# EAGLE board SparkFun_Color_Sensor_OPT4048-Panel (EAGLE 9.6.2), part 1 of 4
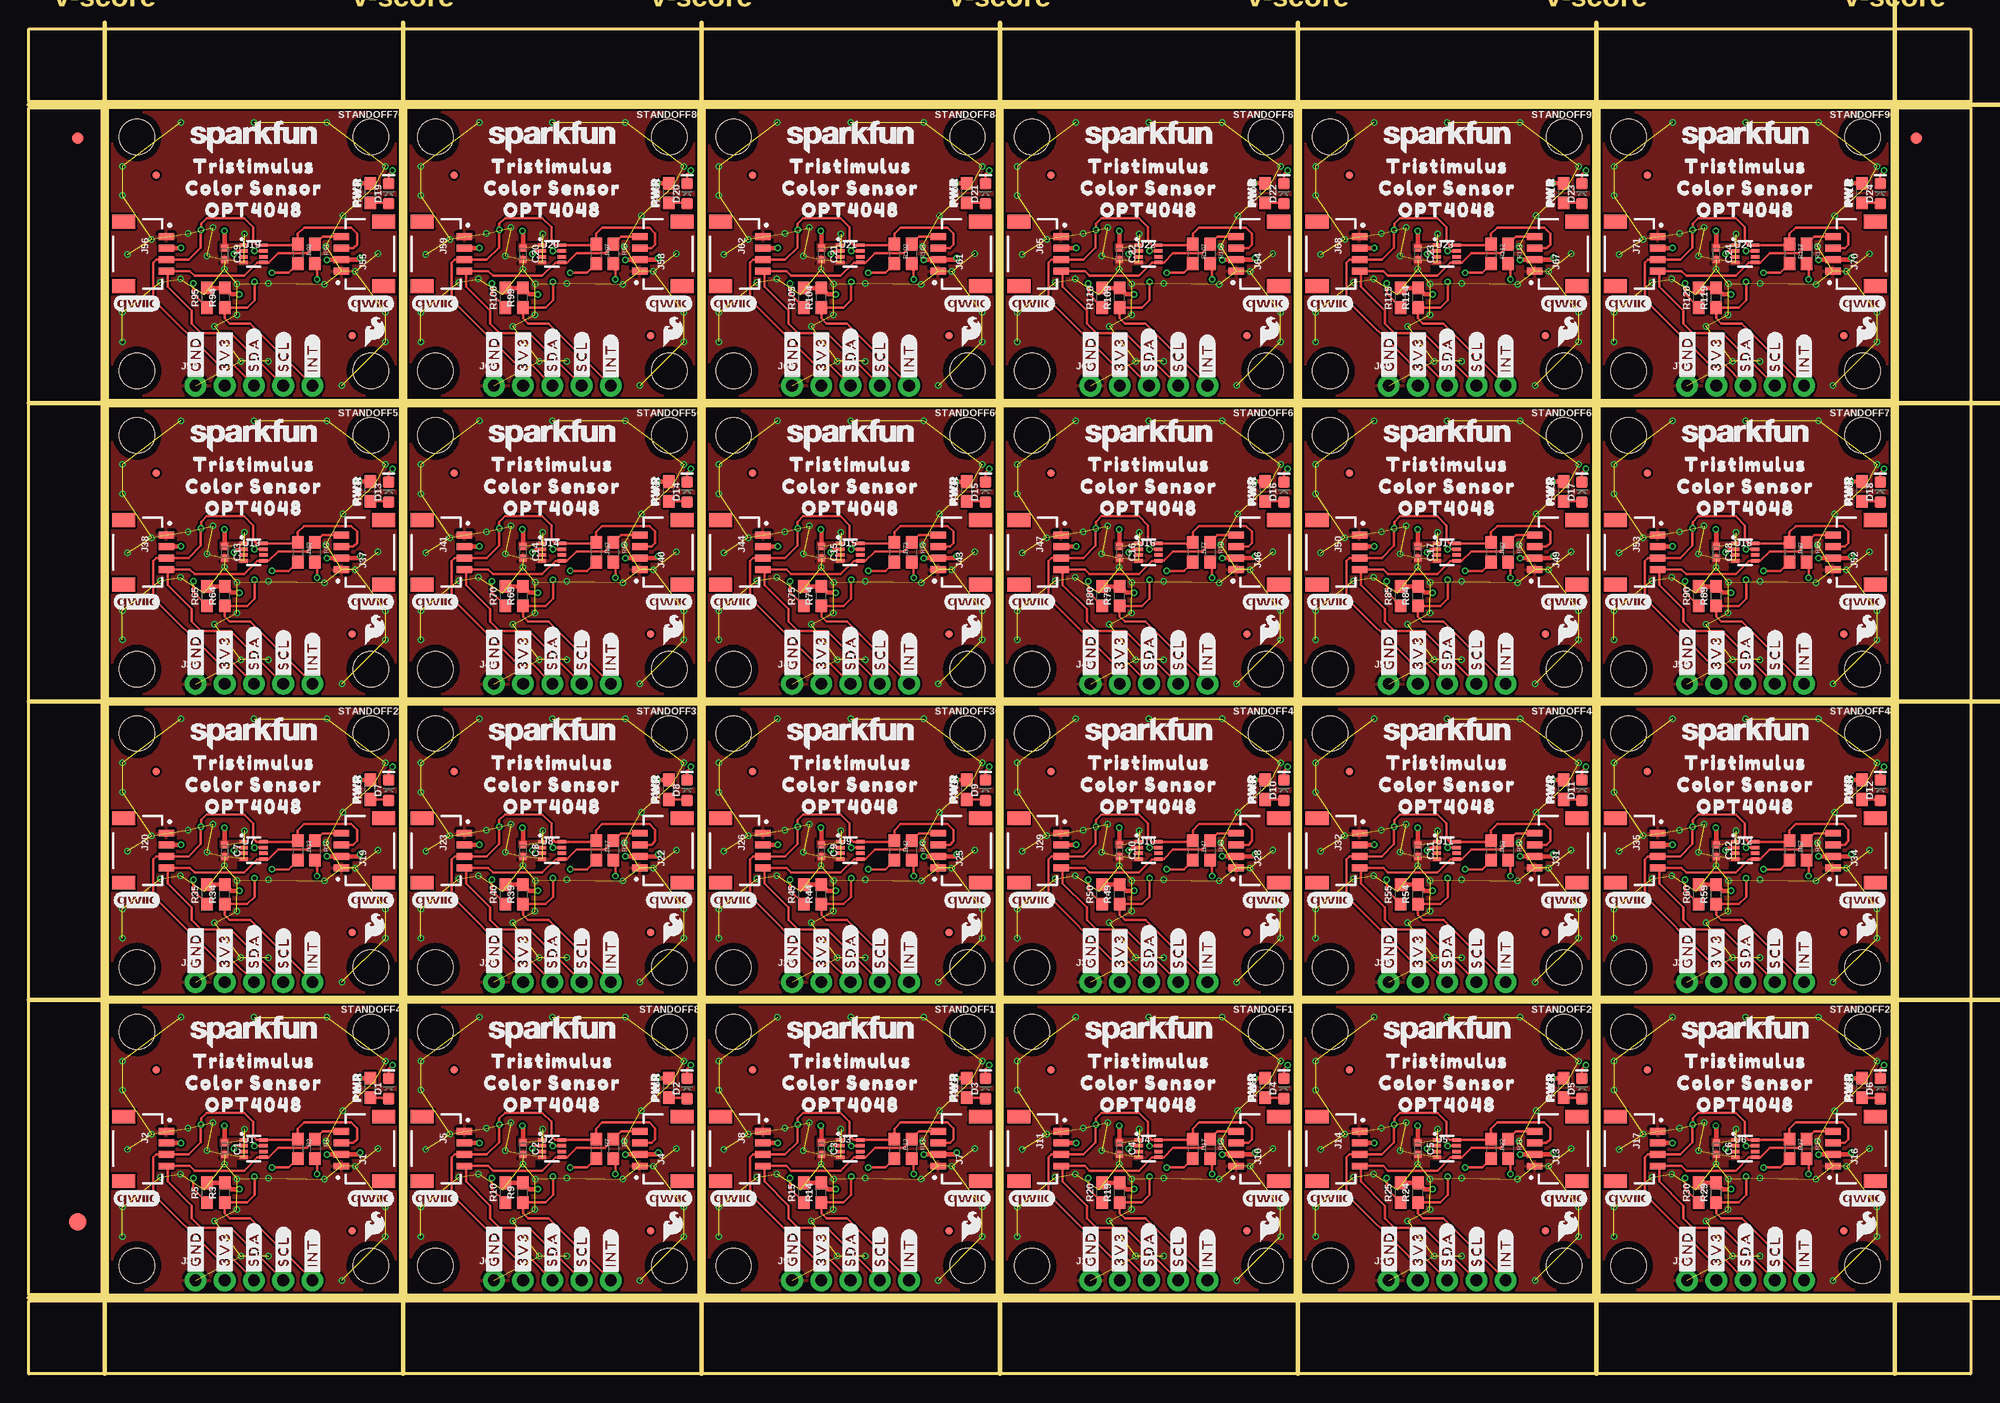
[diagram p0: board, top side]
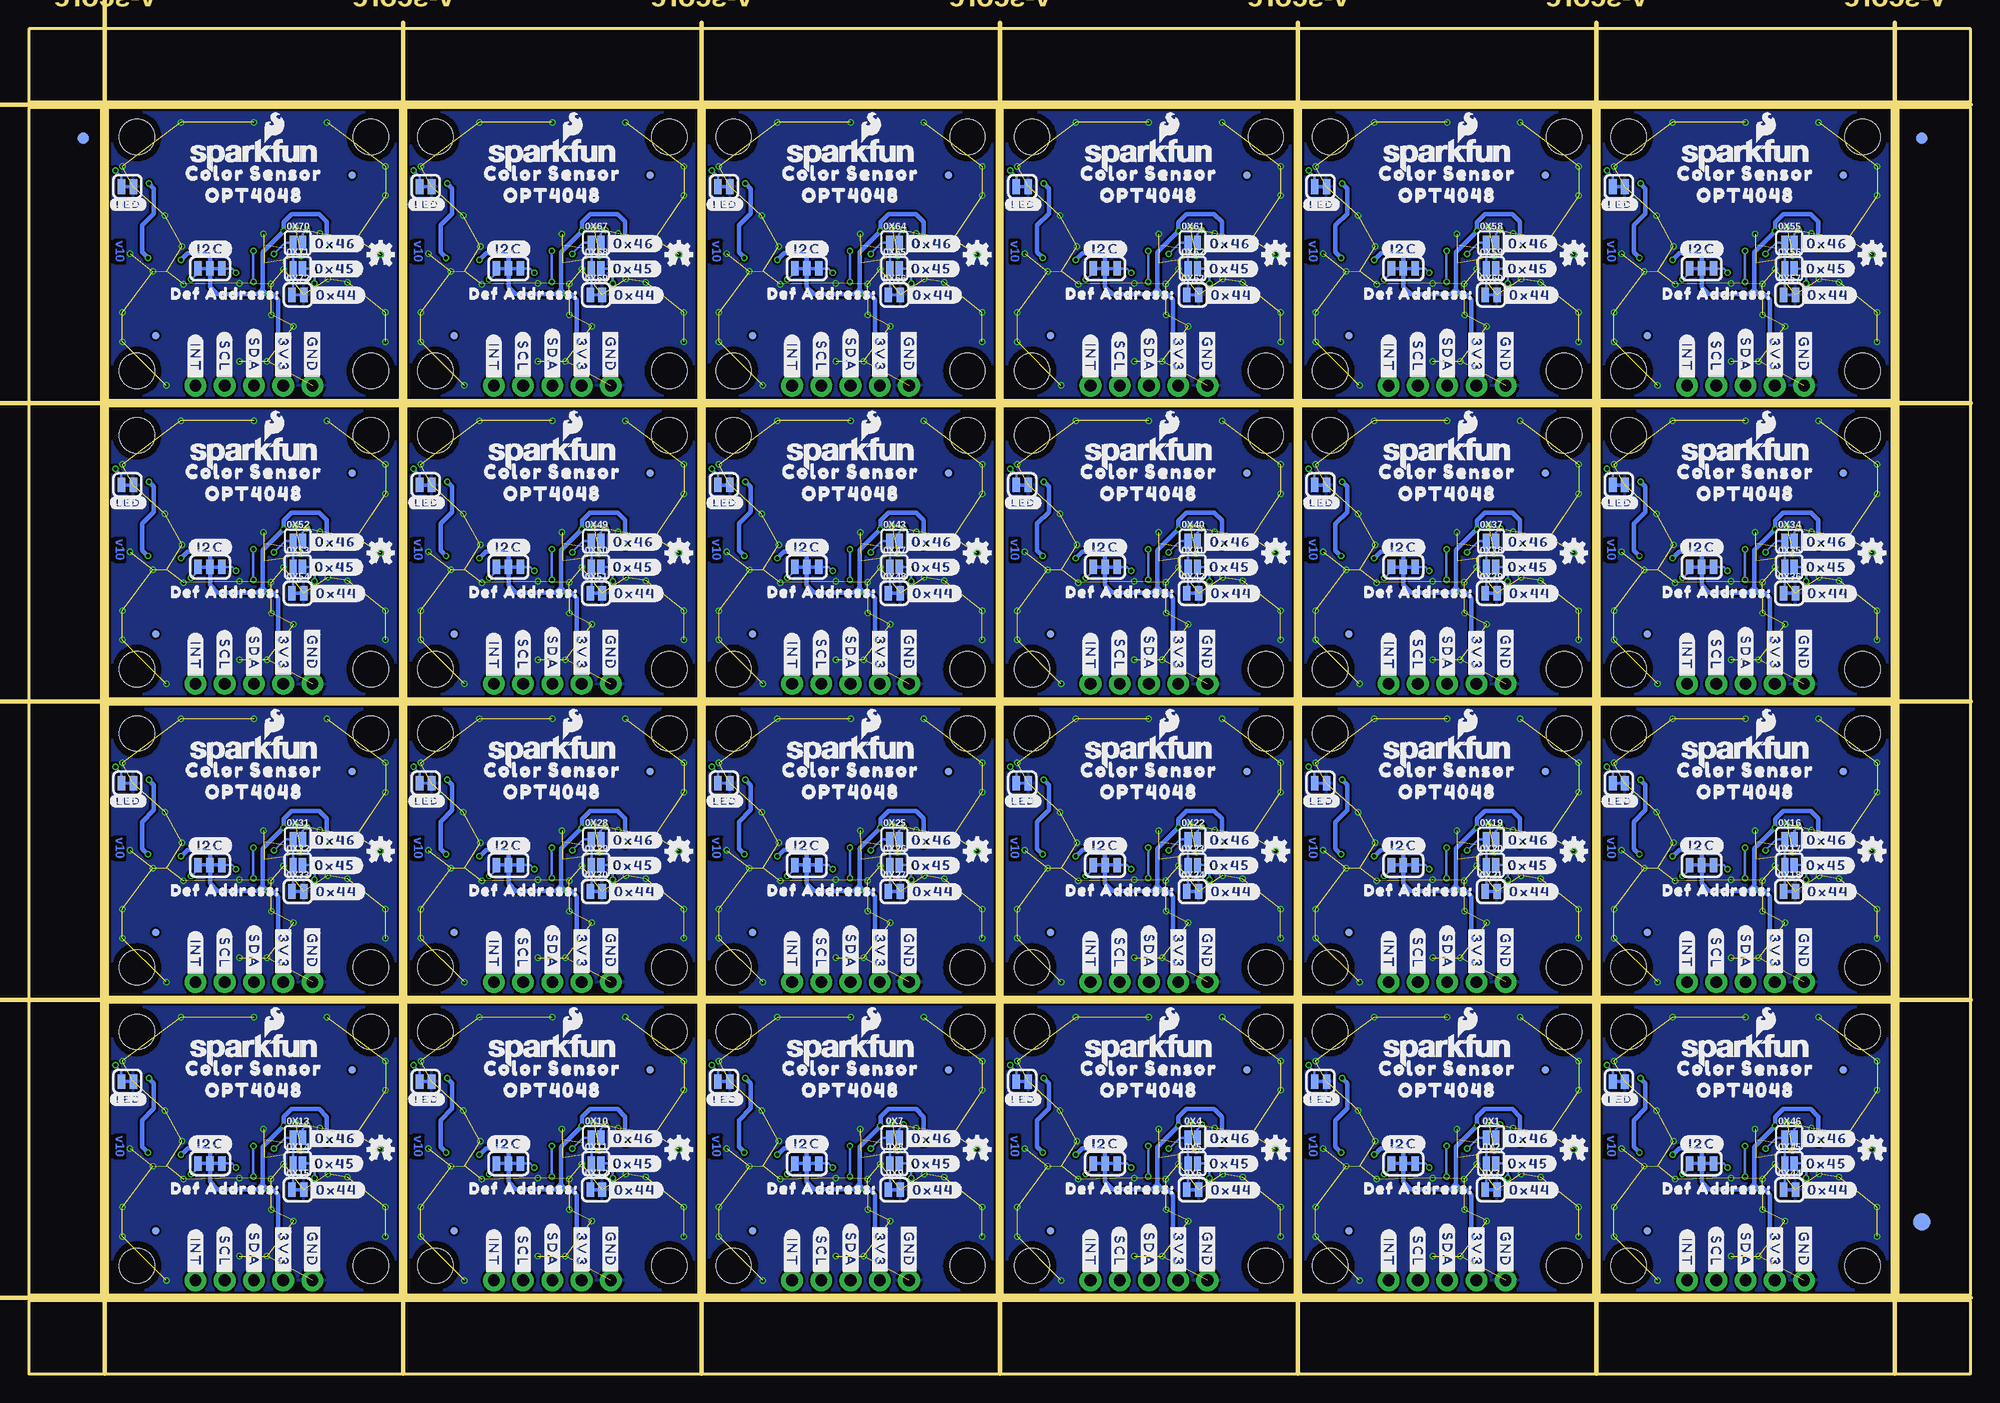
[diagram p1: board, bottom side, seen from below]

Size 168.66 x 116.84 mm. Coordinates in mm from the lower left corner, seen from the top.
Outline: 32.26,32.26 6.86,32.26 6.86,6.86 32.26,6.86 32.26,32.26
Outline: 58.17,32.26 32.77,32.26 32.77,6.86 58.17,6.86 58.17,32.26
Outline: 84.07,32.26 58.67,32.26 58.67,6.86 84.07,6.86 84.07,32.26
Outline: 109.98,32.26 84.58,32.26 84.58,6.86 109.98,6.86 109.98,32.26
Outline: 135.89,32.26 110.49,32.26 110.49,6.86 135.89,6.86 135.89,32.26
Outline: 161.8,32.26 136.4,32.26 136.4,6.86 161.8,6.86 161.8,32.26
Outline: 32.26,58.17 6.86,58.17 6.86,32.77 32.26,32.77 32.26,58.17
Outline: 58.17,58.17 32.77,58.17 32.77,32.77 58.17,32.77 58.17,58.17
Outline: 84.07,58.17 58.67,58.17 58.67,32.77 84.07,32.77 84.07,58.17
Outline: 109.98,58.17 84.58,58.17 84.58,32.77 109.98,32.77 109.98,58.17
Outline: 135.89,58.17 110.49,58.17 110.49,32.77 135.89,32.77 135.89,58.17
Outline: 161.8,58.17 136.4,58.17 136.4,32.77 161.8,32.77 161.8,58.17
Outline: 32.26,84.07 6.86,84.07 6.86,58.67 32.26,58.67 32.26,84.07
Outline: 58.17,84.07 32.77,84.07 32.77,58.67 58.17,58.67 58.17,84.07
Outline: 84.07,84.07 58.67,84.07 58.67,58.67 84.07,58.67 84.07,84.07
Outline: 109.98,84.07 84.58,84.07 84.58,58.67 109.98,58.67 109.98,84.07
Outline: 135.89,84.07 110.49,84.07 110.49,58.67 135.89,58.67 135.89,84.07
Outline: 161.8,84.07 136.4,84.07 136.4,58.67 161.8,58.67 161.8,84.07
Outline: 32.26,109.98 6.86,109.98 6.86,84.58 32.26,84.58 32.26,109.98
Outline: 58.17,109.98 32.77,109.98 32.77,84.58 58.17,84.58 58.17,109.98
Outline: 84.07,109.98 58.67,109.98 58.67,84.58 84.07,84.58 84.07,109.98
Outline: 109.98,109.98 84.58,109.98 84.58,84.58 109.98,84.58 109.98,109.98
Outline: 135.89,109.98 110.49,109.98 110.49,84.58 135.89,84.58 135.89,109.98
Outline: 161.8,109.98 136.4,109.98 136.4,84.58 161.8,84.58 161.8,109.98
Outline: 0,6.35 168.66,6.35 168.66,0 0,0 0,6.35
Outline: 162.31,109.98 168.66,109.98 168.66,6.86 162.31,6.86 162.31,109.98
Outline: 0,116.84 168.66,116.84 168.66,110.49 0,110.49 0,116.84
Outline: 0,109.98 6.35,109.98 6.35,6.86 0,6.86 0,109.98
Copper layers (1*16): Top 0.035mm / dielectric 1.5mm / Bottom 0.035mm
Design rules "SparkFun_Color_Sensor_OPT4048": minimum track width 5mil, minimum drill 0.3mm, track to track 5mil, track to pad 5mil, pad to pad 5mil, via to via 5mil, smd to smd 5mil, copper to edge 7mil, drill to drill 7mil, minimum pad ring 5mil, minimum via ring 5mil, stop-mask expansion 2.5mil, vias tented up to drill 25mil, thermal gap 10mil
tRestrict: area 18.3,18 to 18.6,18.4; area 44.2,18 to 44.6,18.4; area 70.1,18 to 70.5,18.4; area 96,18 to 96.4,18.4; area 121.9,18 to 122.3,18.4; area 147.8,18 to 148.2,18.4; area 18.3,43.9 to 18.6,44.3; area 44.2,43.9 to 44.6,44.3; area 70.1,43.9 to 70.5,44.3; area 96,43.9 to 96.4,44.3; area 121.9,43.9 to 122.3,44.3; area 147.8,43.9 to 148.2,44.3; area 18.3,69.8 to 18.6,70.2; area 44.2,69.8 to 44.6,70.2; area 70.1,69.8 to 70.5,70.2; area 96,69.8 to 96.4,70.2; area 121.9,69.8 to 122.3,70.2; area 147.8,69.8 to 148.2,70.2; area 18.3,95.8 to 18.6,96.1; area 44.2,95.8 to 44.6,96.1; area 70.1,95.8 to 70.5,96.1; area 96,95.8 to 96.4,96.1; area 121.9,95.8 to 122.3,96.1; area 147.8,95.8 to 148.2,96.1
Milling: 12 lines

## Footprints (pad centres in the part's own frame; a part is rotated, then mirrored left to right if it is on the bottom)
SMT-JUMPER_2_NO_SILK = smd 0.635 x 1.27: 1 -0.406,0; 2 0.406,0
SMT-JUMPER_2_NC_TRACE_SILK = smd 0.66 x 1.27: 1 -0.521,0; 2 0.521,0
0402-TIGHT = smd 0.6 x 0.6: 1 -0.5,0; 2 0.5,0
LED-0603 = smd 1 x 1: A -0.877,0; C 0.877,0
FIDUCIAL-1X2 = smd 1 x 1: 1 0,0
FIDUCIAL-1.5X3 = smd 1.5 x 1.5: 1 0,0
FIDUCIAL-MICRO = smd 0.635 x 0.635: 1 0,0
SMT-JUMPER_3_2-NC_TRACE_SILK = smd 0.66 x 1.27: 1 -1.041,0; 2 0,0; 3 1.041,0
JST04_1MM_RA = smd 0.6 x 1.35: 1 -1.5,0; 2 -0.5,0; 3 0.5,0; 4 1.5,0 | smd 1.2 x 2: NC1 2.8,-3.675; NC2 -2.8,-3.675
1X05_NO_SILK = drill 1.016 pad 1.88: 1 0,0; 2 2.54,0; 3 5.08,0; 4 7.62,0; 5 10.16,0
0603 = smd 1.1 x 1: 1 -0.85,0; 2 0.85,0
STAND-OFF-TIGHT = hole 3.048: 0,0
FCSOT = smd 0.72 x 0.3: P1 -0.889,0.762; P2 -0.889,0.262; P3 -0.889,-0.238; P4 -0.889,-0.738; P5 0.831,-0.738; P6 0.831,-0.238; P7 0.831,0.262; P8 0.831,0.762

## Placement (x,y rotation side)
0X1  JUMPER-SMT_2_NO_SILK  [SMT-JUMPER_2_NO_SILK]  41.66,20.52 0 bottom
0X2  JUMPER-SMT_2_NO_SILK  [SMT-JUMPER_2_NO_SILK]  41.66,18.29 0 bottom
0X3  JUMPER-SMT_2_NC_TRACE_SILK  [SMT-JUMPER_2_NC_TRACE_SILK]  41.66,16 0 bottom
0X4  JUMPER-SMT_2_NO_SILK  [SMT-JUMPER_2_NO_SILK]  67.56,20.52 0 bottom
0X5  JUMPER-SMT_2_NO_SILK  [SMT-JUMPER_2_NO_SILK]  67.56,18.29 0 bottom
0X6  JUMPER-SMT_2_NC_TRACE_SILK  [SMT-JUMPER_2_NC_TRACE_SILK]  67.56,16 0 bottom
0X7  JUMPER-SMT_2_NO_SILK  [SMT-JUMPER_2_NO_SILK]  93.47,20.52 0 bottom
0X8  JUMPER-SMT_2_NO_SILK  [SMT-JUMPER_2_NO_SILK]  93.47,18.29 0 bottom
0X9  JUMPER-SMT_2_NC_TRACE_SILK  [SMT-JUMPER_2_NC_TRACE_SILK]  93.47,16 0 bottom
0X10  JUMPER-SMT_2_NO_SILK  [SMT-JUMPER_2_NO_SILK]  119.38,20.52 0 bottom
0X11  JUMPER-SMT_2_NO_SILK  [SMT-JUMPER_2_NO_SILK]  119.38,18.29 0 bottom
0X12  JUMPER-SMT_2_NC_TRACE_SILK  [SMT-JUMPER_2_NC_TRACE_SILK]  119.38,16 0 bottom
0X13  JUMPER-SMT_2_NO_SILK  [SMT-JUMPER_2_NO_SILK]  145.29,20.52 0 bottom
0X14  JUMPER-SMT_2_NO_SILK  [SMT-JUMPER_2_NO_SILK]  145.29,18.29 0 bottom
0X15  JUMPER-SMT_2_NC_TRACE_SILK  [SMT-JUMPER_2_NC_TRACE_SILK]  145.29,16 0 bottom
0X16  JUMPER-SMT_2_NO_SILK  [SMT-JUMPER_2_NO_SILK]  15.75,46.43 0 bottom
0X17  JUMPER-SMT_2_NO_SILK  [SMT-JUMPER_2_NO_SILK]  15.75,44.2 0 bottom
0X18  JUMPER-SMT_2_NC_TRACE_SILK  [SMT-JUMPER_2_NC_TRACE_SILK]  15.75,41.91 0 bottom
0X19  JUMPER-SMT_2_NO_SILK  [SMT-JUMPER_2_NO_SILK]  41.66,46.43 0 bottom
0X20  JUMPER-SMT_2_NO_SILK  [SMT-JUMPER_2_NO_SILK]  41.66,44.2 0 bottom
0X21  JUMPER-SMT_2_NC_TRACE_SILK  [SMT-JUMPER_2_NC_TRACE_SILK]  41.66,41.91 0 bottom
0X22  JUMPER-SMT_2_NO_SILK  [SMT-JUMPER_2_NO_SILK]  67.56,46.43 0 bottom
0X23  JUMPER-SMT_2_NO_SILK  [SMT-JUMPER_2_NO_SILK]  67.56,44.2 0 bottom
0X24  JUMPER-SMT_2_NC_TRACE_SILK  [SMT-JUMPER_2_NC_TRACE_SILK]  67.56,41.91 0 bottom
0X25  JUMPER-SMT_2_NO_SILK  [SMT-JUMPER_2_NO_SILK]  93.47,46.43 0 bottom
0X26  JUMPER-SMT_2_NO_SILK  [SMT-JUMPER_2_NO_SILK]  93.47,44.2 0 bottom
0X27  JUMPER-SMT_2_NC_TRACE_SILK  [SMT-JUMPER_2_NC_TRACE_SILK]  93.47,41.91 0 bottom
0X28  JUMPER-SMT_2_NO_SILK  [SMT-JUMPER_2_NO_SILK]  119.38,46.43 0 bottom
0X29  JUMPER-SMT_2_NO_SILK  [SMT-JUMPER_2_NO_SILK]  119.38,44.2 0 bottom
0X30  JUMPER-SMT_2_NC_TRACE_SILK  [SMT-JUMPER_2_NC_TRACE_SILK]  119.38,41.91 0 bottom
0X31  JUMPER-SMT_2_NO_SILK  [SMT-JUMPER_2_NO_SILK]  145.29,46.43 0 bottom
0X32  JUMPER-SMT_2_NO_SILK  [SMT-JUMPER_2_NO_SILK]  145.29,44.2 0 bottom
0X33  JUMPER-SMT_2_NC_TRACE_SILK  [SMT-JUMPER_2_NC_TRACE_SILK]  145.29,41.91 0 bottom
0X34  JUMPER-SMT_2_NO_SILK  [SMT-JUMPER_2_NO_SILK]  15.75,72.34 0 bottom
0X35  JUMPER-SMT_2_NO_SILK  [SMT-JUMPER_2_NO_SILK]  15.75,70.1 0 bottom
0X36  JUMPER-SMT_2_NC_TRACE_SILK  [SMT-JUMPER_2_NC_TRACE_SILK]  15.75,67.82 0 bottom
0X37  JUMPER-SMT_2_NO_SILK  [SMT-JUMPER_2_NO_SILK]  41.66,72.34 0 bottom
0X38  JUMPER-SMT_2_NO_SILK  [SMT-JUMPER_2_NO_SILK]  41.66,70.1 0 bottom
0X39  JUMPER-SMT_2_NC_TRACE_SILK  [SMT-JUMPER_2_NC_TRACE_SILK]  41.66,67.82 0 bottom
0X40  JUMPER-SMT_2_NO_SILK  [SMT-JUMPER_2_NO_SILK]  67.56,72.34 0 bottom
0X41  JUMPER-SMT_2_NO_SILK  [SMT-JUMPER_2_NO_SILK]  67.56,70.1 0 bottom
0X42  JUMPER-SMT_2_NC_TRACE_SILK  [SMT-JUMPER_2_NC_TRACE_SILK]  67.56,67.82 0 bottom
0X43  JUMPER-SMT_2_NO_SILK  [SMT-JUMPER_2_NO_SILK]  93.47,72.34 0 bottom
0X44  JUMPER-SMT_2_NC_TRACE_SILK  [SMT-JUMPER_2_NC_TRACE_SILK]  15.75,16 0 bottom
0X45  JUMPER-SMT_2_NO_SILK  [SMT-JUMPER_2_NO_SILK]  15.75,18.29 0 bottom
0X46  JUMPER-SMT_2_NO_SILK  [SMT-JUMPER_2_NO_SILK]  15.75,20.52 0 bottom
0X47  JUMPER-SMT_2_NO_SILK  [SMT-JUMPER_2_NO_SILK]  93.47,70.1 0 bottom
0X48  JUMPER-SMT_2_NC_TRACE_SILK  [SMT-JUMPER_2_NC_TRACE_SILK]  93.47,67.82 0 bottom
0X49  JUMPER-SMT_2_NO_SILK  [SMT-JUMPER_2_NO_SILK]  119.38,72.34 0 bottom
0X50  JUMPER-SMT_2_NO_SILK  [SMT-JUMPER_2_NO_SILK]  119.38,70.1 0 bottom
0X51  JUMPER-SMT_2_NC_TRACE_SILK  [SMT-JUMPER_2_NC_TRACE_SILK]  119.38,67.82 0 bottom
0X52  JUMPER-SMT_2_NO_SILK  [SMT-JUMPER_2_NO_SILK]  145.29,72.34 0 bottom
0X53  JUMPER-SMT_2_NO_SILK  [SMT-JUMPER_2_NO_SILK]  145.29,70.1 0 bottom
0X54  JUMPER-SMT_2_NC_TRACE_SILK  [SMT-JUMPER_2_NC_TRACE_SILK]  145.29,67.82 0 bottom
0X55  JUMPER-SMT_2_NO_SILK  [SMT-JUMPER_2_NO_SILK]  15.75,98.25 0 bottom
0X56  JUMPER-SMT_2_NO_SILK  [SMT-JUMPER_2_NO_SILK]  15.75,96.01 0 bottom
0X57  JUMPER-SMT_2_NC_TRACE_SILK  [SMT-JUMPER_2_NC_TRACE_SILK]  15.75,93.73 0 bottom
0X58  JUMPER-SMT_2_NO_SILK  [SMT-JUMPER_2_NO_SILK]  41.66,98.25 0 bottom
0X59  JUMPER-SMT_2_NO_SILK  [SMT-JUMPER_2_NO_SILK]  41.66,96.01 0 bottom
0X60  JUMPER-SMT_2_NC_TRACE_SILK  [SMT-JUMPER_2_NC_TRACE_SILK]  41.66,93.73 0 bottom
0X61  JUMPER-SMT_2_NO_SILK  [SMT-JUMPER_2_NO_SILK]  67.56,98.25 0 bottom
0X62  JUMPER-SMT_2_NO_SILK  [SMT-JUMPER_2_NO_SILK]  67.56,96.01 0 bottom
0X63  JUMPER-SMT_2_NC_TRACE_SILK  [SMT-JUMPER_2_NC_TRACE_SILK]  67.56,93.73 0 bottom
0X64  JUMPER-SMT_2_NO_SILK  [SMT-JUMPER_2_NO_SILK]  93.47,98.25 0 bottom
0X65  JUMPER-SMT_2_NO_SILK  [SMT-JUMPER_2_NO_SILK]  93.47,96.01 0 bottom
0X66  JUMPER-SMT_2_NC_TRACE_SILK  [SMT-JUMPER_2_NC_TRACE_SILK]  93.47,93.73 0 bottom
0X67  JUMPER-SMT_2_NO_SILK  [SMT-JUMPER_2_NO_SILK]  119.38,98.25 0 bottom
0X68  JUMPER-SMT_2_NO_SILK  [SMT-JUMPER_2_NO_SILK]  119.38,96.01 0 bottom
0X69  JUMPER-SMT_2_NC_TRACE_SILK  [SMT-JUMPER_2_NC_TRACE_SILK]  119.38,93.73 0 bottom
0X70  JUMPER-SMT_2_NO_SILK  [SMT-JUMPER_2_NO_SILK]  145.29,98.25 0 bottom
0X71  JUMPER-SMT_2_NO_SILK  [SMT-JUMPER_2_NO_SILK]  145.29,96.01 0 bottom
0X72  JUMPER-SMT_2_NC_TRACE_SILK  [SMT-JUMPER_2_NC_TRACE_SILK]  145.29,93.73 0 bottom
C1  0.1uF  [0402-TIGHT]  17.02,19.56 270 top
C2  0.1uF  [0402-TIGHT]  42.93,19.56 270 top
C3  0.1uF  [0402-TIGHT]  68.83,19.56 270 top
C4  0.1uF  [0402-TIGHT]  94.74,19.56 270 top
C5  0.1uF  [0402-TIGHT]  120.65,19.56 270 top
C6  0.1uF  [0402-TIGHT]  146.56,19.56 270 top
C7  0.1uF  [0402-TIGHT]  17.02,45.47 270 top
C8  0.1uF  [0402-TIGHT]  42.93,45.47 270 top
C9  0.1uF  [0402-TIGHT]  68.83,45.47 270 top
C10  0.1uF  [0402-TIGHT]  94.74,45.47 270 top
C11  0.1uF  [0402-TIGHT]  120.65,45.47 270 top
C12  0.1uF  [0402-TIGHT]  146.56,45.47 270 top
C13  0.1uF  [0402-TIGHT]  17.02,71.37 270 top
C14  0.1uF  [0402-TIGHT]  42.93,71.37 270 top
C15  0.1uF  [0402-TIGHT]  68.83,71.37 270 top
C16  0.1uF  [0402-TIGHT]  94.74,71.37 270 top
C17  0.1uF  [0402-TIGHT]  120.65,71.37 270 top
C18  0.1uF  [0402-TIGHT]  146.56,71.37 270 top
C19  0.1uF  [0402-TIGHT]  17.02,97.28 270 top
C20  0.1uF  [0402-TIGHT]  42.93,97.28 270 top
C21  0.1uF  [0402-TIGHT]  68.83,97.28 270 top
C22  0.1uF  [0402-TIGHT]  94.74,97.28 270 top
C23  0.1uF  [0402-TIGHT]  120.65,97.28 270 top
C24  0.1uF  [0402-TIGHT]  146.56,97.28 270 top
D1  RED  [LED-0603]  31.27,24.79 90 top
D2  RED  [LED-0603]  57.18,24.79 90 top
D3  RED  [LED-0603]  83.08,24.79 90 top
D4  RED  [LED-0603]  108.99,24.79 90 top
D5  RED  [LED-0603]  134.9,24.79 90 top
D6  RED  [LED-0603]  160.81,24.79 90 top
D7  RED  [LED-0603]  31.27,50.7 90 top
D8  RED  [LED-0603]  57.18,50.7 90 top
D9  RED  [LED-0603]  83.08,50.7 90 top
D10  RED  [LED-0603]  108.99,50.7 90 top
D11  RED  [LED-0603]  134.9,50.7 90 top
D12  RED  [LED-0603]  160.81,50.7 90 top
D13  RED  [LED-0603]  31.27,76.61 90 top
D14  RED  [LED-0603]  57.18,76.61 90 top
D15  RED  [LED-0603]  83.08,76.61 90 top
D16  RED  [LED-0603]  108.99,76.61 90 top
D17  RED  [LED-0603]  134.9,76.61 90 top
D18  RED  [LED-0603]  160.81,76.61 90 top
D19  RED  [LED-0603]  31.27,102.51 90 top
D20  RED  [LED-0603]  57.18,102.51 90 top
D21  RED  [LED-0603]  83.08,102.51 90 top
D22  RED  [LED-0603]  108.99,102.51 90 top
D23  RED  [LED-0603]  134.9,102.51 90 top
D24  RED  [LED-0603]  160.81,102.51 90 top
E$1  [FIDUCIAL-1X2]  4.23,107.31 0 top
E$2  [FIDUCIAL-1X2]  4.23,107.31 0 bottom
E$3  [FIDUCIAL-1X2]  163.91,107.31 0 top
E$4  [FIDUCIAL-1X2]  163.91,107.31 0 bottom
E$5  [FIDUCIAL-1.5X3]  4.23,13.21 0 top
E$6  [FIDUCIAL-1.5X3]  4.23,13.21 0 bottom
FD1  FIDUCIALUFIDUCIAL  [FIDUCIAL-MICRO]  11.05,26.42 0 bottom
FD2  FIDUCIALUFIDUCIAL  [FIDUCIAL-MICRO]  28.09,12.45 0 bottom
FD3  FIDUCIALUFIDUCIAL  [FIDUCIAL-MICRO]  36.96,26.42 0 bottom
FD4  FIDUCIALUFIDUCIAL  [FIDUCIAL-MICRO]  54,12.45 0 bottom
FD5  FIDUCIALUFIDUCIAL  [FIDUCIAL-MICRO]  62.86,26.42 0 bottom
FD6  FIDUCIALUFIDUCIAL  [FIDUCIAL-MICRO]  79.91,12.45 0 bottom
FD7  FIDUCIALUFIDUCIAL  [FIDUCIAL-MICRO]  88.77,26.42 0 bottom
FD8  FIDUCIALUFIDUCIAL  [FIDUCIAL-MICRO]  105.82,12.45 0 bottom
FD9  FIDUCIALUFIDUCIAL  [FIDUCIAL-MICRO]  114.68,26.42 0 bottom
FD10  FIDUCIALUFIDUCIAL  [FIDUCIAL-MICRO]  131.72,12.45 0 bottom
FD11  FIDUCIALUFIDUCIAL  [FIDUCIAL-MICRO]  140.59,26.42 0 bottom
FD12  FIDUCIALUFIDUCIAL  [FIDUCIAL-MICRO]  157.63,12.45 0 bottom
FD13  FIDUCIALUFIDUCIAL  [FIDUCIAL-MICRO]  11.05,52.32 0 bottom
FD14  FIDUCIALUFIDUCIAL  [FIDUCIAL-MICRO]  28.09,38.35 0 bottom
FD15  FIDUCIALUFIDUCIAL  [FIDUCIAL-MICRO]  36.96,52.32 0 bottom
FD16  FIDUCIALUFIDUCIAL  [FIDUCIAL-MICRO]  54,38.35 0 bottom
FD17  FIDUCIALUFIDUCIAL  [FIDUCIAL-MICRO]  62.86,52.32 0 bottom
FD18  FIDUCIALUFIDUCIAL  [FIDUCIAL-MICRO]  79.91,38.35 0 bottom
FD19  FIDUCIALUFIDUCIAL  [FIDUCIAL-MICRO]  88.77,52.32 0 bottom
FD20  FIDUCIALUFIDUCIAL  [FIDUCIAL-MICRO]  105.82,38.35 0 bottom
FD21  FIDUCIALUFIDUCIAL  [FIDUCIAL-MICRO]  114.68,52.32 0 bottom
FD22  FIDUCIALUFIDUCIAL  [FIDUCIAL-MICRO]  131.72,38.35 0 bottom
FD23  FIDUCIALUFIDUCIAL  [FIDUCIAL-MICRO]  140.59,52.32 0 bottom
FD24  FIDUCIALUFIDUCIAL  [FIDUCIAL-MICRO]  157.63,38.35 0 bottom
FD25  FIDUCIALUFIDUCIAL  [FIDUCIAL-MICRO]  11.05,78.23 0 bottom
FD26  FIDUCIALUFIDUCIAL  [FIDUCIAL-MICRO]  28.09,64.26 0 bottom
FD27  FIDUCIALUFIDUCIAL  [FIDUCIAL-MICRO]  36.96,78.23 0 bottom
FD28  FIDUCIALUFIDUCIAL  [FIDUCIAL-MICRO]  54,64.26 0 bottom
FD29  FIDUCIALUFIDUCIAL  [FIDUCIAL-MICRO]  62.86,78.23 0 bottom
FD30  FIDUCIALUFIDUCIAL  [FIDUCIAL-MICRO]  79.91,64.26 0 bottom
FD31  FIDUCIALUFIDUCIAL  [FIDUCIAL-MICRO]  88.77,78.23 0 bottom
FD32  FIDUCIALUFIDUCIAL  [FIDUCIAL-MICRO]  105.82,64.26 0 bottom
FD33  FIDUCIALUFIDUCIAL  [FIDUCIAL-MICRO]  114.68,78.23 0 bottom
FD34  FIDUCIALUFIDUCIAL  [FIDUCIAL-MICRO]  131.72,64.26 0 bottom
FD35  FIDUCIALUFIDUCIAL  [FIDUCIAL-MICRO]  140.59,78.23 0 bottom
FD36  FIDUCIALUFIDUCIAL  [FIDUCIAL-MICRO]  157.63,64.26 0 bottom
FD37  FIDUCIALUFIDUCIAL  [FIDUCIAL-MICRO]  11.05,104.14 0 bottom
FD38  FIDUCIALUFIDUCIAL  [FIDUCIAL-MICRO]  28.09,90.17 0 bottom
FD39  FIDUCIALUFIDUCIAL  [FIDUCIAL-MICRO]  36.96,104.14 0 bottom
FD40  FIDUCIALUFIDUCIAL  [FIDUCIAL-MICRO]  54,90.17 0 bottom
FD41  FIDUCIALUFIDUCIAL  [FIDUCIAL-MICRO]  62.86,104.14 0 bottom
FD42  FIDUCIALUFIDUCIAL  [FIDUCIAL-MICRO]  79.91,90.17 0 bottom
FD43  FIDUCIALUFIDUCIAL  [FIDUCIAL-MICRO]  88.77,104.14 0 bottom
FD44  FIDUCIALUFIDUCIAL  [FIDUCIAL-MICRO]  105.82,90.17 0 bottom
FD45  FIDUCIALUFIDUCIAL  [FIDUCIAL-MICRO]  114.68,104.14 0 bottom
FD46  FIDUCIALUFIDUCIAL  [FIDUCIAL-MICRO]  131.72,90.17 0 bottom
FD47  FIDUCIALUFIDUCIAL  [FIDUCIAL-MICRO]  140.59,104.14 0 bottom
FD48  FIDUCIALUFIDUCIAL  [FIDUCIAL-MICRO]  157.63,90.17 0 bottom
FID1  FIDUCIALUFIDUCIAL  [FIDUCIAL-MICRO]  11.05,26.42 0 top
FID2  FIDUCIALUFIDUCIAL  [FIDUCIAL-MICRO]  28.09,12.45 0 top
FID3  FIDUCIALUFIDUCIAL  [FIDUCIAL-MICRO]  36.96,26.42 0 top
FID4  FIDUCIALUFIDUCIAL  [FIDUCIAL-MICRO]  54,12.45 0 top
FID5  FIDUCIALUFIDUCIAL  [FIDUCIAL-MICRO]  62.86,26.42 0 top
FID6  FIDUCIALUFIDUCIAL  [FIDUCIAL-MICRO]  79.91,12.45 0 top
FID7  FIDUCIALUFIDUCIAL  [FIDUCIAL-MICRO]  88.77,26.42 0 top
FID8  FIDUCIALUFIDUCIAL  [FIDUCIAL-MICRO]  105.82,12.45 0 top
FID9  FIDUCIALUFIDUCIAL  [FIDUCIAL-MICRO]  114.68,26.42 0 top
FID10  FIDUCIALUFIDUCIAL  [FIDUCIAL-MICRO]  131.72,12.45 0 top
FID11  FIDUCIALUFIDUCIAL  [FIDUCIAL-MICRO]  140.59,26.42 0 top
FID12  FIDUCIALUFIDUCIAL  [FIDUCIAL-MICRO]  157.63,12.45 0 top
FID13  FIDUCIALUFIDUCIAL  [FIDUCIAL-MICRO]  11.05,52.32 0 top
FID14  FIDUCIALUFIDUCIAL  [FIDUCIAL-MICRO]  28.09,38.35 0 top
FID15  FIDUCIALUFIDUCIAL  [FIDUCIAL-MICRO]  36.96,52.32 0 top
FID16  FIDUCIALUFIDUCIAL  [FIDUCIAL-MICRO]  54,38.35 0 top
FID17  FIDUCIALUFIDUCIAL  [FIDUCIAL-MICRO]  62.86,52.32 0 top
FID18  FIDUCIALUFIDUCIAL  [FIDUCIAL-MICRO]  79.91,38.35 0 top
FID19  FIDUCIALUFIDUCIAL  [FIDUCIAL-MICRO]  88.77,52.32 0 top
FID20  FIDUCIALUFIDUCIAL  [FIDUCIAL-MICRO]  105.82,38.35 0 top
FID21  FIDUCIALUFIDUCIAL  [FIDUCIAL-MICRO]  114.68,52.32 0 top
FID22  FIDUCIALUFIDUCIAL  [FIDUCIAL-MICRO]  131.72,38.35 0 top
FID23  FIDUCIALUFIDUCIAL  [FIDUCIAL-MICRO]  140.59,52.32 0 top
FID24  FIDUCIALUFIDUCIAL  [FIDUCIAL-MICRO]  157.63,38.35 0 top
FID25  FIDUCIALUFIDUCIAL  [FIDUCIAL-MICRO]  11.05,78.23 0 top
FID26  FIDUCIALUFIDUCIAL  [FIDUCIAL-MICRO]  28.09,64.26 0 top
FID27  FIDUCIALUFIDUCIAL  [FIDUCIAL-MICRO]  36.96,78.23 0 top
FID28  FIDUCIALUFIDUCIAL  [FIDUCIAL-MICRO]  54,64.26 0 top
FID29  FIDUCIALUFIDUCIAL  [FIDUCIAL-MICRO]  62.86,78.23 0 top
FID30  FIDUCIALUFIDUCIAL  [FIDUCIAL-MICRO]  79.91,64.26 0 top
FID31  FIDUCIALUFIDUCIAL  [FIDUCIAL-MICRO]  88.77,78.23 0 top
FID32  FIDUCIALUFIDUCIAL  [FIDUCIAL-MICRO]  105.82,64.26 0 top
FID33  FIDUCIALUFIDUCIAL  [FIDUCIAL-MICRO]  114.68,78.23 0 top
FID34  FIDUCIALUFIDUCIAL  [FIDUCIAL-MICRO]  131.72,64.26 0 top
FID35  FIDUCIALUFIDUCIAL  [FIDUCIAL-MICRO]  140.59,78.23 0 top
FID36  FIDUCIALUFIDUCIAL  [FIDUCIAL-MICRO]  157.63,64.26 0 top
FID37  FIDUCIALUFIDUCIAL  [FIDUCIAL-MICRO]  11.05,104.14 0 top
FID38  FIDUCIALUFIDUCIAL  [FIDUCIAL-MICRO]  28.09,90.17 0 top
FID39  FIDUCIALUFIDUCIAL  [FIDUCIAL-MICRO]  36.96,104.14 0 top
FID40  FIDUCIALUFIDUCIAL  [FIDUCIAL-MICRO]  54,90.17 0 top
FID41  FIDUCIALUFIDUCIAL  [FIDUCIAL-MICRO]  62.86,104.14 0 top
FID42  FIDUCIALUFIDUCIAL  [FIDUCIAL-MICRO]  79.91,90.17 0 top
FID43  FIDUCIALUFIDUCIAL  [FIDUCIAL-MICRO]  88.77,104.14 0 top
FID44  FIDUCIALUFIDUCIAL  [FIDUCIAL-MICRO]  105.82,90.17 0 top
FID45  FIDUCIALUFIDUCIAL  [FIDUCIAL-MICRO]  114.68,104.14 0 top
FID46  FIDUCIALUFIDUCIAL  [FIDUCIAL-MICRO]  131.72,90.17 0 top
FID47  FIDUCIALUFIDUCIAL  [FIDUCIAL-MICRO]  140.59,104.14 0 top
FID48  FIDUCIALUFIDUCIAL  [FIDUCIAL-MICRO]  157.63,90.17 0 top
I2C_PU  S_MODE  [SMT-JUMPER_3_2-NC_TRACE_SILK]  23.37,18.29 0 bottom
I2C_PU1  S_MODE  [SMT-JUMPER_3_2-NC_TRACE_SILK]  49.28,18.29 0 bottom
I2C_PU2  S_MODE  [SMT-JUMPER_3_2-NC_TRACE_SILK]  75.18,18.29 0 bottom
I2C_PU3  S_MODE  [SMT-JUMPER_3_2-NC_TRACE_SILK]  101.09,18.29 0 bottom
I2C_PU4  S_MODE  [SMT-JUMPER_3_2-NC_TRACE_SILK]  127,18.29 0 bottom
I2C_PU5  S_MODE  [SMT-JUMPER_3_2-NC_TRACE_SILK]  152.91,18.29 0 bottom
I2C_PU6  S_MODE  [SMT-JUMPER_3_2-NC_TRACE_SILK]  23.37,44.2 0 bottom
I2C_PU7  S_MODE  [SMT-JUMPER_3_2-NC_TRACE_SILK]  49.28,44.2 0 bottom
I2C_PU8  S_MODE  [SMT-JUMPER_3_2-NC_TRACE_SILK]  75.18,44.2 0 bottom
I2C_PU9  S_MODE  [SMT-JUMPER_3_2-NC_TRACE_SILK]  101.09,44.2 0 bottom
I2C_PU10  S_MODE  [SMT-JUMPER_3_2-NC_TRACE_SILK]  127,44.2 0 bottom
I2C_PU11  S_MODE  [SMT-JUMPER_3_2-NC_TRACE_SILK]  152.91,44.2 0 bottom
I2C_PU12  S_MODE  [SMT-JUMPER_3_2-NC_TRACE_SILK]  23.37,70.1 0 bottom
I2C_PU13  S_MODE  [SMT-JUMPER_3_2-NC_TRACE_SILK]  49.28,70.1 0 bottom
I2C_PU14  S_MODE  [SMT-JUMPER_3_2-NC_TRACE_SILK]  75.18,70.1 0 bottom
I2C_PU15  S_MODE  [SMT-JUMPER_3_2-NC_TRACE_SILK]  101.09,70.1 0 bottom
I2C_PU16  S_MODE  [SMT-JUMPER_3_2-NC_TRACE_SILK]  127,70.1 0 bottom
I2C_PU17  S_MODE  [SMT-JUMPER_3_2-NC_TRACE_SILK]  152.91,70.1 0 bottom
I2C_PU18  S_MODE  [SMT-JUMPER_3_2-NC_TRACE_SILK]  23.37,96.01 0 bottom
I2C_PU19  S_MODE  [SMT-JUMPER_3_2-NC_TRACE_SILK]  49.28,96.01 0 bottom
I2C_PU20  S_MODE  [SMT-JUMPER_3_2-NC_TRACE_SILK]  75.18,96.01 0 bottom
I2C_PU21  S_MODE  [SMT-JUMPER_3_2-NC_TRACE_SILK]  101.09,96.01 0 bottom
I2C_PU22  S_MODE  [SMT-JUMPER_3_2-NC_TRACE_SILK]  127,96.01 0 bottom
I2C_PU23  S_MODE  [SMT-JUMPER_3_2-NC_TRACE_SILK]  152.91,96.01 0 bottom
J1  QWIIC_RIGHT_ANGLE  [JST04_1MM_RA]  27.15,19.56 90 top
J2  QWIIC_RIGHT_ANGLE  [JST04_1MM_RA]  11.94,19.56 270 top
J3  [1X05_NO_SILK]  14.48,8.13 0 top
J4  QWIIC_RIGHT_ANGLE  [JST04_1MM_RA]  53.06,19.56 90 top
J5  QWIIC_RIGHT_ANGLE  [JST04_1MM_RA]  37.85,19.56 270 top
J6  [1X05_NO_SILK]  40.39,8.13 0 top
J7  QWIIC_RIGHT_ANGLE  [JST04_1MM_RA]  78.97,19.56 90 top
J8  QWIIC_RIGHT_ANGLE  [JST04_1MM_RA]  63.75,19.56 270 top
J9  [1X05_NO_SILK]  66.29,8.13 0 top
J10  QWIIC_RIGHT_ANGLE  [JST04_1MM_RA]  104.88,19.56 90 top
J11  QWIIC_RIGHT_ANGLE  [JST04_1MM_RA]  89.66,19.56 270 top
J12  [1X05_NO_SILK]  92.2,8.13 0 top
J13  QWIIC_RIGHT_ANGLE  [JST04_1MM_RA]  130.78,19.56 90 top
J14  QWIIC_RIGHT_ANGLE  [JST04_1MM_RA]  115.57,19.56 270 top
J15  [1X05_NO_SILK]  118.11,8.13 0 top
J16  QWIIC_RIGHT_ANGLE  [JST04_1MM_RA]  156.69,19.56 90 top
J17  QWIIC_RIGHT_ANGLE  [JST04_1MM_RA]  141.48,19.56 270 top
J18  [1X05_NO_SILK]  144.02,8.13 0 top
J19  QWIIC_RIGHT_ANGLE  [JST04_1MM_RA]  27.15,45.47 90 top
J20  QWIIC_RIGHT_ANGLE  [JST04_1MM_RA]  11.94,45.47 270 top
J21  [1X05_NO_SILK]  14.48,34.04 0 top
J22  QWIIC_RIGHT_ANGLE  [JST04_1MM_RA]  53.06,45.47 90 top
J23  QWIIC_RIGHT_ANGLE  [JST04_1MM_RA]  37.85,45.47 270 top
J24  [1X05_NO_SILK]  40.39,34.04 0 top
J25  QWIIC_RIGHT_ANGLE  [JST04_1MM_RA]  78.97,45.47 90 top
J26  QWIIC_RIGHT_ANGLE  [JST04_1MM_RA]  63.75,45.47 270 top
J27  [1X05_NO_SILK]  66.29,34.04 0 top
J28  QWIIC_RIGHT_ANGLE  [JST04_1MM_RA]  104.88,45.47 90 top
J29  QWIIC_RIGHT_ANGLE  [JST04_1MM_RA]  89.66,45.47 270 top
J30  [1X05_NO_SILK]  92.2,34.04 0 top
J31  QWIIC_RIGHT_ANGLE  [JST04_1MM_RA]  130.78,45.47 90 top
J32  QWIIC_RIGHT_ANGLE  [JST04_1MM_RA]  115.57,45.47 270 top
J33  [1X05_NO_SILK]  118.11,34.04 0 top
J34  QWIIC_RIGHT_ANGLE  [JST04_1MM_RA]  156.69,45.47 90 top
J35  QWIIC_RIGHT_ANGLE  [JST04_1MM_RA]  141.48,45.47 270 top
J36  [1X05_NO_SILK]  144.02,34.04 0 top
J37  QWIIC_RIGHT_ANGLE  [JST04_1MM_RA]  27.15,71.37 90 top
J38  QWIIC_RIGHT_ANGLE  [JST04_1MM_RA]  11.94,71.37 270 top
J39  [1X05_NO_SILK]  14.48,59.94 0 top
J40  QWIIC_RIGHT_ANGLE  [JST04_1MM_RA]  53.06,71.37 90 top
J41  QWIIC_RIGHT_ANGLE  [JST04_1MM_RA]  37.85,71.37 270 top
J42  [1X05_NO_SILK]  40.39,59.94 0 top
J43  QWIIC_RIGHT_ANGLE  [JST04_1MM_RA]  78.97,71.37 90 top
J44  QWIIC_RIGHT_ANGLE  [JST04_1MM_RA]  63.75,71.37 270 top
J45  [1X05_NO_SILK]  66.29,59.94 0 top
J46  QWIIC_RIGHT_ANGLE  [JST04_1MM_RA]  104.88,71.37 90 top
J47  QWIIC_RIGHT_ANGLE  [JST04_1MM_RA]  89.66,71.37 270 top
J48  [1X05_NO_SILK]  92.2,59.94 0 top
J49  QWIIC_RIGHT_ANGLE  [JST04_1MM_RA]  130.78,71.37 90 top
J50  QWIIC_RIGHT_ANGLE  [JST04_1MM_RA]  115.57,71.37 270 top
J51  [1X05_NO_SILK]  118.11,59.94 0 top
J52  QWIIC_RIGHT_ANGLE  [JST04_1MM_RA]  156.69,71.37 90 top
J53  QWIIC_RIGHT_ANGLE  [JST04_1MM_RA]  141.48,71.37 270 top
J54  [1X05_NO_SILK]  144.02,59.94 0 top
J55  QWIIC_RIGHT_ANGLE  [JST04_1MM_RA]  27.15,97.28 90 top
J56  QWIIC_RIGHT_ANGLE  [JST04_1MM_RA]  11.94,97.28 270 top
J57  [1X05_NO_SILK]  14.48,85.85 0 top
J58  QWIIC_RIGHT_ANGLE  [JST04_1MM_RA]  53.06,97.28 90 top
J59  QWIIC_RIGHT_ANGLE  [JST04_1MM_RA]  37.85,97.28 270 top
J60  [1X05_NO_SILK]  40.39,85.85 0 top
J61  QWIIC_RIGHT_ANGLE  [JST04_1MM_RA]  78.97,97.28 90 top
J62  QWIIC_RIGHT_ANGLE  [JST04_1MM_RA]  63.75,97.28 270 top
J63  [1X05_NO_SILK]  66.29,85.85 0 top
J64  QWIIC_RIGHT_ANGLE  [JST04_1MM_RA]  104.88,97.28 90 top
J65  QWIIC_RIGHT_ANGLE  [JST04_1MM_RA]  89.66,97.28 270 top
J66  [1X05_NO_SILK]  92.2,85.85 0 top
J67  QWIIC_RIGHT_ANGLE  [JST04_1MM_RA]  130.78,97.28 90 top
J68  QWIIC_RIGHT_ANGLE  [JST04_1MM_RA]  115.57,97.28 270 top
J69  [1X05_NO_SILK]  118.11,85.85 0 top
J70  QWIIC_RIGHT_ANGLE  [JST04_1MM_RA]  156.69,97.28 90 top
J71  QWIIC_RIGHT_ANGLE  [JST04_1MM_RA]  141.48,97.28 270 top
J72  [1X05_NO_SILK]  144.02,85.85 0 top
LED  JUMPER-SMT_2_NC_TRACE_SILK  [SMT-JUMPER_2_NC_TRACE_SILK]  30.56,25.4 180 bottom
LED1  JUMPER-SMT_2_NC_TRACE_SILK  [SMT-JUMPER_2_NC_TRACE_SILK]  56.46,25.4 180 bottom
LED2  JUMPER-SMT_2_NC_TRACE_SILK  [SMT-JUMPER_2_NC_TRACE_SILK]  82.37,25.4 180 bottom
LED3  JUMPER-SMT_2_NC_TRACE_SILK  [SMT-JUMPER_2_NC_TRACE_SILK]  108.28,25.4 180 bottom
LED4  JUMPER-SMT_2_NC_TRACE_SILK  [SMT-JUMPER_2_NC_TRACE_SILK]  134.19,25.4 180 bottom
LED5  JUMPER-SMT_2_NC_TRACE_SILK  [SMT-JUMPER_2_NC_TRACE_SILK]  160.1,25.4 180 bottom
LED6  JUMPER-SMT_2_NC_TRACE_SILK  [SMT-JUMPER_2_NC_TRACE_SILK]  30.56,51.31 180 bottom
LED7  JUMPER-SMT_2_NC_TRACE_SILK  [SMT-JUMPER_2_NC_TRACE_SILK]  56.46,51.31 180 bottom
LED8  JUMPER-SMT_2_NC_TRACE_SILK  [SMT-JUMPER_2_NC_TRACE_SILK]  82.37,51.31 180 bottom
LED9  JUMPER-SMT_2_NC_TRACE_SILK  [SMT-JUMPER_2_NC_TRACE_SILK]  108.28,51.31 180 bottom
LED10  JUMPER-SMT_2_NC_TRACE_SILK  [SMT-JUMPER_2_NC_TRACE_SILK]  134.19,51.31 180 bottom
LED11  JUMPER-SMT_2_NC_TRACE_SILK  [SMT-JUMPER_2_NC_TRACE_SILK]  160.1,51.31 180 bottom
LED12  JUMPER-SMT_2_NC_TRACE_SILK  [SMT-JUMPER_2_NC_TRACE_SILK]  30.56,77.22 180 bottom
LED13  JUMPER-SMT_2_NC_TRACE_SILK  [SMT-JUMPER_2_NC_TRACE_SILK]  56.46,77.22 180 bottom
LED14  JUMPER-SMT_2_NC_TRACE_SILK  [SMT-JUMPER_2_NC_TRACE_SILK]  82.37,77.22 180 bottom
LED15  JUMPER-SMT_2_NC_TRACE_SILK  [SMT-JUMPER_2_NC_TRACE_SILK]  108.28,77.22 180 bottom
LED16  JUMPER-SMT_2_NC_TRACE_SILK  [SMT-JUMPER_2_NC_TRACE_SILK]  134.19,77.22 180 bottom
LED17  JUMPER-SMT_2_NC_TRACE_SILK  [SMT-JUMPER_2_NC_TRACE_SILK]  160.1,77.22 180 bottom
LED18  JUMPER-SMT_2_NC_TRACE_SILK  [SMT-JUMPER_2_NC_TRACE_SILK]  30.56,103.12 180 bottom
LED19  JUMPER-SMT_2_NC_TRACE_SILK  [SMT-JUMPER_2_NC_TRACE_SILK]  56.46,103.12 180 bottom
LED20  JUMPER-SMT_2_NC_TRACE_SILK  [SMT-JUMPER_2_NC_TRACE_SILK]  82.37,103.12 180 bottom
LED21  JUMPER-SMT_2_NC_TRACE_SILK  [SMT-JUMPER_2_NC_TRACE_SILK]  108.28,103.12 180 bottom
LED22  JUMPER-SMT_2_NC_TRACE_SILK  [SMT-JUMPER_2_NC_TRACE_SILK]  134.19,103.12 180 bottom
LED23  JUMPER-SMT_2_NC_TRACE_SILK  [SMT-JUMPER_2_NC_TRACE_SILK]  160.1,103.12 180 bottom
LOGO1  QWIIC_LOGO_4MM  [QWIIC_4MM]  29.72,15.24 0 top
LOGO2  OSHW-LOGOMINI  [OSHW-LOGO-MINI]  8.56,19.51 0 bottom
LOGO3  SFE_LOGO_NAME_FLAME.1_INCH  [SFE_LOGO_NAME_FLAME_.1]  19.52,28.14 0 bottom
LOGO4  OSHW-LOGOMINI  [OSHW-LOGO-MINI]  34.47,19.51 0 bottom
LOGO5  QWIIC_LOGO_4MM  [QWIIC_4MM]  9.4,15.24 0 top
LOGO6  SFE_LOGO_NAME_FLAME.1_INCH  [SFE_LOGO_NAME_FLAME_.1]  45.42,28.14 0 bottom
LOGO7  QWIIC_LOGO_4MM  [QWIIC_4MM]  55.63,15.24 0 top
LOGO8  QWIIC_LOGO_4MM  [QWIIC_4MM]  35.31,15.24 0 top
LOGO9  OSHW-LOGOMINI  [OSHW-LOGO-MINI]  60.38,19.51 0 bottom
LOGO10  SFE_LOGO_NAME_FLAME.1_INCH  [SFE_LOGO_NAME_FLAME_.1]  71.33,28.14 0 bottom
LOGO11  QWIIC_LOGO_4MM  [QWIIC_4MM]  81.53,15.24 0 top
LOGO12  QWIIC_LOGO_4MM  [QWIIC_4MM]  61.21,15.24 0 top
LOGO13  OSHW-LOGOMINI  [OSHW-LOGO-MINI]  86.28,19.51 0 bottom
LOGO14  SFE_LOGO_NAME_FLAME.1_INCH  [SFE_LOGO_NAME_FLAME_.1]  97.24,28.14 0 bottom
LOGO15  QWIIC_LOGO_4MM  [QWIIC_4MM]  107.44,15.24 0 top
LOGO16  QWIIC_LOGO_4MM  [QWIIC_4MM]  87.12,15.24 0 top
LOGO17  OSHW-LOGOMINI  [OSHW-LOGO-MINI]  112.19,19.51 0 bottom
LOGO18  SFE_LOGO_NAME_FLAME.1_INCH  [SFE_LOGO_NAME_FLAME_.1]  123.15,28.14 0 bottom
LOGO19  QWIIC_LOGO_4MM  [QWIIC_4MM]  133.35,15.24 0 top
LOGO20  QWIIC_LOGO_4MM  [QWIIC_4MM]  113.03,15.24 0 top
LOGO21  OSHW-LOGOMINI  [OSHW-LOGO-MINI]  138.1,19.51 0 bottom
LOGO22  SFE_LOGO_NAME_FLAME.1_INCH  [SFE_LOGO_NAME_FLAME_.1]  149.06,28.14 0 bottom
LOGO23  QWIIC_LOGO_4MM  [QWIIC_4MM]  159.26,15.24 0 top
LOGO24  QWIIC_LOGO_4MM  [QWIIC_4MM]  138.94,15.24 0 top
LOGO25  OSHW-LOGOMINI  [OSHW-LOGO-MINI]  8.56,45.42 0 bottom
LOGO26  SFE_LOGO_NAME_FLAME.1_INCH  [SFE_LOGO_NAME_FLAME_.1]  19.52,54.05 0 bottom
LOGO27  QWIIC_LOGO_4MM  [QWIIC_4MM]  29.72,41.15 0 top
LOGO28  QWIIC_LOGO_4MM  [QWIIC_4MM]  9.4,41.15 0 top
LOGO29  OSHW-LOGOMINI  [OSHW-LOGO-MINI]  34.47,45.42 0 bottom
LOGO30  SFE_LOGO_NAME_FLAME.1_INCH  [SFE_LOGO_NAME_FLAME_.1]  45.42,54.05 0 bottom
LOGO31  QWIIC_LOGO_4MM  [QWIIC_4MM]  55.63,41.15 0 top
LOGO32  QWIIC_LOGO_4MM  [QWIIC_4MM]  35.31,41.15 0 top
LOGO33  OSHW-LOGOMINI  [OSHW-LOGO-MINI]  60.38,45.42 0 bottom
LOGO34  SFE_LOGO_NAME_FLAME.1_INCH  [SFE_LOGO_NAME_FLAME_.1]  71.33,54.05 0 bottom
LOGO35  QWIIC_LOGO_4MM  [QWIIC_4MM]  81.53,41.15 0 top
LOGO36  QWIIC_LOGO_4MM  [QWIIC_4MM]  61.21,41.15 0 top
LOGO37  OSHW-LOGOMINI  [OSHW-LOGO-MINI]  86.28,45.42 0 bottom
LOGO38  SFE_LOGO_NAME_FLAME.1_INCH  [SFE_LOGO_NAME_FLAME_.1]  97.24,54.05 0 bottom
LOGO39  QWIIC_LOGO_4MM  [QWIIC_4MM]  107.44,41.15 0 top
LOGO40  QWIIC_LOGO_4MM  [QWIIC_4MM]  87.12,41.15 0 top
LOGO41  OSHW-LOGOMINI  [OSHW-LOGO-MINI]  112.19,45.42 0 bottom
LOGO42  SFE_LOGO_NAME_FLAME.1_INCH  [SFE_LOGO_NAME_FLAME_.1]  123.15,54.05 0 bottom
LOGO43  QWIIC_LOGO_4MM  [QWIIC_4MM]  133.35,41.15 0 top
LOGO44  QWIIC_LOGO_4MM  [QWIIC_4MM]  113.03,41.15 0 top
LOGO45  OSHW-LOGOMINI  [OSHW-LOGO-MINI]  138.1,45.42 0 bottom
LOGO46  SFE_LOGO_NAME_FLAME.1_INCH  [SFE_LOGO_NAME_FLAME_.1]  149.06,54.05 0 bottom
LOGO47  QWIIC_LOGO_4MM  [QWIIC_4MM]  159.26,41.15 0 top
LOGO48  QWIIC_LOGO_4MM  [QWIIC_4MM]  138.94,41.15 0 top
LOGO49  OSHW-LOGOMINI  [OSHW-LOGO-MINI]  8.56,71.32 0 bottom
LOGO50  SFE_LOGO_NAME_FLAME.1_INCH  [SFE_LOGO_NAME_FLAME_.1]  19.52,79.96 0 bottom
LOGO51  QWIIC_LOGO_4MM  [QWIIC_4MM]  29.72,67.06 0 top
LOGO52  QWIIC_LOGO_4MM  [QWIIC_4MM]  9.4,67.06 0 top
LOGO53  OSHW-LOGOMINI  [OSHW-LOGO-MINI]  34.47,71.32 0 bottom
LOGO54  SFE_LOGO_NAME_FLAME.1_INCH  [SFE_LOGO_NAME_FLAME_.1]  45.42,79.96 0 bottom
LOGO55  QWIIC_LOGO_4MM  [QWIIC_4MM]  55.63,67.06 0 top
LOGO56  QWIIC_LOGO_4MM  [QWIIC_4MM]  35.31,67.06 0 top
LOGO57  OSHW-LOGOMINI  [OSHW-LOGO-MINI]  60.38,71.32 0 bottom
LOGO58  SFE_LOGO_NAME_FLAME.1_INCH  [SFE_LOGO_NAME_FLAME_.1]  71.33,79.96 0 bottom
LOGO59  QWIIC_LOGO_4MM  [QWIIC_4MM]  81.53,67.06 0 top
LOGO60  QWIIC_LOGO_4MM  [QWIIC_4MM]  61.21,67.06 0 top
LOGO61  OSHW-LOGOMINI  [OSHW-LOGO-MINI]  86.28,71.32 0 bottom
LOGO62  SFE_LOGO_NAME_FLAME.1_INCH  [SFE_LOGO_NAME_FLAME_.1]  97.24,79.96 0 bottom
LOGO63  QWIIC_LOGO_4MM  [QWIIC_4MM]  107.44,67.06 0 top
LOGO64  QWIIC_LOGO_4MM  [QWIIC_4MM]  87.12,67.06 0 top
LOGO65  OSHW-LOGOMINI  [OSHW-LOGO-MINI]  112.19,71.32 0 bottom
LOGO66  SFE_LOGO_NAME_FLAME.1_INCH  [SFE_LOGO_NAME_FLAME_.1]  123.15,79.96 0 bottom
LOGO67  QWIIC_LOGO_4MM  [QWIIC_4MM]  133.35,67.06 0 top
LOGO68  QWIIC_LOGO_4MM  [QWIIC_4MM]  113.03,67.06 0 top
LOGO69  OSHW-LOGOMINI  [OSHW-LOGO-MINI]  138.1,71.32 0 bottom
LOGO70  SFE_LOGO_NAME_FLAME.1_INCH  [SFE_LOGO_NAME_FLAME_.1]  149.06,79.96 0 bottom
LOGO71  QWIIC_LOGO_4MM  [QWIIC_4MM]  159.26,67.06 0 top
LOGO72  QWIIC_LOGO_4MM  [QWIIC_4MM]  138.94,67.06 0 top
LOGO73  OSHW-LOGOMINI  [OSHW-LOGO-MINI]  8.56,97.23 0 bottom
LOGO74  SFE_LOGO_NAME_FLAME.1_INCH  [SFE_LOGO_NAME_FLAME_.1]  19.52,105.86 0 bottom
LOGO75  QWIIC_LOGO_4MM  [QWIIC_4MM]  29.72,92.96 0 top
LOGO76  QWIIC_LOGO_4MM  [QWIIC_4MM]  9.4,92.96 0 top
LOGO77  OSHW-LOGOMINI  [OSHW-LOGO-MINI]  34.47,97.23 0 bottom
LOGO78  SFE_LOGO_NAME_FLAME.1_INCH  [SFE_LOGO_NAME_FLAME_.1]  45.42,105.86 0 bottom
LOGO79  QWIIC_LOGO_4MM  [QWIIC_4MM]  55.63,92.96 0 top
LOGO80  QWIIC_LOGO_4MM  [QWIIC_4MM]  35.31,92.96 0 top
LOGO81  OSHW-LOGOMINI  [OSHW-LOGO-MINI]  60.38,97.23 0 bottom
LOGO82  SFE_LOGO_NAME_FLAME.1_INCH  [SFE_LOGO_NAME_FLAME_.1]  71.33,105.86 0 bottom
LOGO83  QWIIC_LOGO_4MM  [QWIIC_4MM]  81.53,92.96 0 top
LOGO84  QWIIC_LOGO_4MM  [QWIIC_4MM]  61.21,92.96 0 top
LOGO85  OSHW-LOGOMINI  [OSHW-LOGO-MINI]  86.28,97.23 0 bottom
LOGO86  SFE_LOGO_NAME_FLAME.1_INCH  [SFE_LOGO_NAME_FLAME_.1]  97.24,105.86 0 bottom
LOGO87  QWIIC_LOGO_4MM  [QWIIC_4MM]  107.44,92.96 0 top
LOGO88  QWIIC_LOGO_4MM  [QWIIC_4MM]  87.12,92.96 0 top
LOGO89  OSHW-LOGOMINI  [OSHW-LOGO-MINI]  112.19,97.23 0 bottom
LOGO90  SFE_LOGO_NAME_FLAME.1_INCH  [SFE_LOGO_NAME_FLAME_.1]  123.15,105.86 0 bottom
LOGO91  QWIIC_LOGO_4MM  [QWIIC_4MM]  133.35,92.96 0 top
LOGO92  QWIIC_LOGO_4MM  [QWIIC_4MM]  113.03,92.96 0 top
LOGO93  OSHW-LOGOMINI  [OSHW-LOGO-MINI]  138.1,97.23 0 bottom
LOGO94  SFE_LOGO_NAME_FLAME.1_INCH  [SFE_LOGO_NAME_FLAME_.1]  149.06,105.86 0 bottom
LOGO95  QWIIC_LOGO_4MM  [QWIIC_4MM]  159.26,92.96 0 top
LOGO96  QWIIC_LOGO_4MM  [QWIIC_4MM]  138.94,92.96 0 top
R1  2.2k  [0603]  24.87,19.56 270 top
R2  2.2k  [0603]  23.37,19.56 270 top
R3  10k  [0603]  17.02,15.75 90 top
R4  4.7k  [0603]  29.67,24.84 90 top
R5  10k  [0603]  15.49,15.75 90 top
R6  2.2k  [0603]  50.77,19.56 270 top
R7  2.2k  [0603]  49.28,19.56 270 top
R8  4.7k  [0603]  55.58,24.84 90 top
R9  10k  [0603]  42.93,15.75 90 top
R10  10k  [0603]  41.4,15.75 90 top
R11  2.2k  [0603]  76.68,19.56 270 top
R12  2.2k  [0603]  75.18,19.56 270 top
R13  4.7k  [0603]  81.48,24.84 90 top
R14  10k  [0603]  68.83,15.75 90 top
R15  10k  [0603]  67.31,15.75 90 top
R16  2.2k  [0603]  102.59,19.56 270 top
R17  2.2k  [0603]  101.09,19.56 270 top
R18  4.7k  [0603]  107.39,24.84 90 top
R19  10k  [0603]  94.74,15.75 90 top
R20  10k  [0603]  93.22,15.75 90 top
R21  2.2k  [0603]  128.5,19.56 270 top
R22  2.2k  [0603]  127,19.56 270 top
R23  4.7k  [0603]  133.3,24.84 90 top
R24  10k  [0603]  120.65,15.75 90 top
R25  10k  [0603]  119.13,15.75 90 top
R26  2.2k  [0603]  154.41,19.56 270 top
R27  2.2k  [0603]  152.91,19.56 270 top
R28  4.7k  [0603]  159.21,24.84 90 top
R29  10k  [0603]  146.56,15.75 90 top
R30  10k  [0603]  145.03,15.75 90 top
R31  2.2k  [0603]  24.87,45.47 270 top
R32  2.2k  [0603]  23.37,45.47 270 top
R33  4.7k  [0603]  29.67,50.75 90 top
R34  10k  [0603]  17.02,41.66 90 top
R35  10k  [0603]  15.49,41.66 90 top
R36  2.2k  [0603]  50.77,45.47 270 top
R37  2.2k  [0603]  49.28,45.47 270 top
R38  4.7k  [0603]  55.58,50.75 90 top
R39  10k  [0603]  42.93,41.66 90 top
R40  10k  [0603]  41.4,41.66 90 top
R41  2.2k  [0603]  76.68,45.47 270 top
R42  2.2k  [0603]  75.18,45.47 270 top
R43  4.7k  [0603]  81.48,50.75 90 top
R44  10k  [0603]  68.83,41.66 90 top
R45  10k  [0603]  67.31,41.66 90 top
R46  2.2k  [0603]  102.59,45.47 270 top
R47  2.2k  [0603]  101.09,45.47 270 top
R48  4.7k  [0603]  107.39,50.75 90 top
R49  10k  [0603]  94.74,41.66 90 top
R50  10k  [0603]  93.22,41.66 90 top
R51  2.2k  [0603]  128.5,45.47 270 top
R52  2.2k  [0603]  127,45.47 270 top
R53  4.7k  [0603]  133.3,50.75 90 top
R54  10k  [0603]  120.65,41.66 90 top
R55  10k  [0603]  119.13,41.66 90 top
R56  2.2k  [0603]  154.41,45.47 270 top
R57  2.2k  [0603]  152.91,45.47 270 top
R58  4.7k  [0603]  159.21,50.75 90 top
R59  10k  [0603]  146.56,41.66 90 top
R60  10k  [0603]  145.03,41.66 90 top
R61  2.2k  [0603]  24.87,71.37 270 top
R62  2.2k  [0603]  23.37,71.37 270 top
R63  4.7k  [0603]  29.67,76.66 90 top
R64  10k  [0603]  17.02,67.56 90 top
R65  10k  [0603]  15.49,67.56 90 top
R66  2.2k  [0603]  50.77,71.37 270 top
R67  2.2k  [0603]  49.28,71.37 270 top
R68  4.7k  [0603]  55.58,76.66 90 top
R69  10k  [0603]  42.93,67.56 90 top
R70  10k  [0603]  41.4,67.56 90 top
R71  2.2k  [0603]  76.68,71.37 270 top
R72  2.2k  [0603]  75.18,71.37 270 top
R73  4.7k  [0603]  81.48,76.66 90 top
R74  10k  [0603]  68.83,67.56 90 top
R75  10k  [0603]  67.31,67.56 90 top
R76  2.2k  [0603]  102.59,71.37 270 top
R77  2.2k  [0603]  101.09,71.37 270 top
R78  4.7k  [0603]  107.39,76.66 90 top
R79  10k  [0603]  94.74,67.56 90 top
R80  10k  [0603]  93.22,67.56 90 top
R81  2.2k  [0603]  128.5,71.37 270 top
R82  2.2k  [0603]  127,71.37 270 top
R83  4.7k  [0603]  133.3,76.66 90 top
R84  10k  [0603]  120.65,67.56 90 top
R85  10k  [0603]  119.13,67.56 90 top
R86  2.2k  [0603]  154.41,71.37 270 top
R87  2.2k  [0603]  152.91,71.37 270 top
R88  4.7k  [0603]  159.21,76.66 90 top
R89  10k  [0603]  146.56,67.56 90 top
R90  10k  [0603]  145.03,67.56 90 top
R91  2.2k  [0603]  24.87,97.28 270 top
R92  2.2k  [0603]  23.37,97.28 270 top
R93  4.7k  [0603]  29.67,102.57 90 top
R94  10k  [0603]  17.02,93.47 90 top
R95  10k  [0603]  15.49,93.47 90 top
R96  2.2k  [0603]  50.77,97.28 270 top
R97  2.2k  [0603]  49.28,97.28 270 top
R98  4.7k  [0603]  55.58,102.57 90 top
R99  10k  [0603]  42.93,93.47 90 top
R100  10k  [0603]  41.4,93.47 90 top
R101  2.2k  [0603]  76.68,97.28 270 top
R102  2.2k  [0603]  75.18,97.28 270 top
R103  4.7k  [0603]  81.48,102.57 90 top
R104  10k  [0603]  68.83,93.47 90 top
R105  10k  [0603]  67.31,93.47 90 top
R106  2.2k  [0603]  102.59,97.28 270 top
R107  2.2k  [0603]  101.09,97.28 270 top
R108  4.7k  [0603]  107.39,102.57 90 top
R109  10k  [0603]  94.74,93.47 90 top
R110  10k  [0603]  93.22,93.47 90 top
R111  2.2k  [0603]  128.5,97.28 270 top
R112  2.2k  [0603]  127,97.28 270 top
R113  4.7k  [0603]  133.3,102.57 90 top
R114  10k  [0603]  120.65,93.47 90 top
R115  10k  [0603]  119.13,93.47 90 top
R116  2.2k  [0603]  154.41,97.28 270 top
R117  2.2k  [0603]  152.91,97.28 270 top
R118  4.7k  [0603]  159.21,102.57 90 top
R119  10k  [0603]  146.56,93.47 90 top
R120  10k  [0603]  145.03,93.47 90 top
STANDOFF1  STAND-OFFTIGHT  [STAND-OFF-TIGHT]  9.4,29.72 0 top
STANDOFF2  STAND-OFFTIGHT  [STAND-OFF-TIGHT]  9.4,9.4 0 top
STANDOFF3  STAND-OFFTIGHT  [STAND-OFF-TIGHT]  29.72,9.4 0 top
STANDOFF4  STAND-OFFTIGHT  [STAND-OFF-TIGHT]  29.72,29.72 0 top
STANDOFF5  STAND-OFFTIGHT  [STAND-OFF-TIGHT]  35.31,29.72 0 top
STANDOFF6  STAND-OFFTIGHT  [STAND-OFF-TIGHT]  35.31,9.4 0 top
STANDOFF7  STAND-OFFTIGHT  [STAND-OFF-TIGHT]  55.63,9.4 0 top
STANDOFF8  STAND-OFFTIGHT  [STAND-OFF-TIGHT]  55.63,29.72 0 top
STANDOFF9  STAND-OFFTIGHT  [STAND-OFF-TIGHT]  61.21,29.72 0 top
STANDOFF10  STAND-OFFTIGHT  [STAND-OFF-TIGHT]  61.21,9.4 0 top
STANDOFF11  STAND-OFFTIGHT  [STAND-OFF-TIGHT]  81.53,9.4 0 top
STANDOFF12  STAND-OFFTIGHT  [STAND-OFF-TIGHT]  81.53,29.72 0 top
STANDOFF13  STAND-OFFTIGHT  [STAND-OFF-TIGHT]  87.12,29.72 0 top
STANDOFF14  STAND-OFFTIGHT  [STAND-OFF-TIGHT]  87.12,9.4 0 top
STANDOFF15  STAND-OFFTIGHT  [STAND-OFF-TIGHT]  107.44,9.4 0 top
STANDOFF16  STAND-OFFTIGHT  [STAND-OFF-TIGHT]  107.44,29.72 0 top
STANDOFF17  STAND-OFFTIGHT  [STAND-OFF-TIGHT]  113.03,29.72 0 top
STANDOFF18  STAND-OFFTIGHT  [STAND-OFF-TIGHT]  113.03,9.4 0 top
STANDOFF19  STAND-OFFTIGHT  [STAND-OFF-TIGHT]  133.35,9.4 0 top
STANDOFF20  STAND-OFFTIGHT  [STAND-OFF-TIGHT]  133.35,29.72 0 top
STANDOFF21  STAND-OFFTIGHT  [STAND-OFF-TIGHT]  138.94,29.72 0 top
STANDOFF22  STAND-OFFTIGHT  [STAND-OFF-TIGHT]  138.94,9.4 0 top
STANDOFF23  STAND-OFFTIGHT  [STAND-OFF-TIGHT]  159.26,9.4 0 top
STANDOFF24  STAND-OFFTIGHT  [STAND-OFF-TIGHT]  159.26,29.72 0 top
STANDOFF25  STAND-OFFTIGHT  [STAND-OFF-TIGHT]  9.4,55.63 0 top
STANDOFF26  STAND-OFFTIGHT  [STAND-OFF-TIGHT]  9.4,35.31 0 top
STANDOFF27  STAND-OFFTIGHT  [STAND-OFF-TIGHT]  29.72,35.31 0 top
STANDOFF28  STAND-OFFTIGHT  [STAND-OFF-TIGHT]  29.72,55.63 0 top
STANDOFF29  STAND-OFFTIGHT  [STAND-OFF-TIGHT]  35.31,55.63 0 top
STANDOFF30  STAND-OFFTIGHT  [STAND-OFF-TIGHT]  35.31,35.31 0 top
STANDOFF31  STAND-OFFTIGHT  [STAND-OFF-TIGHT]  55.63,35.31 0 top
STANDOFF32  STAND-OFFTIGHT  [STAND-OFF-TIGHT]  55.63,55.63 0 top
STANDOFF33  STAND-OFFTIGHT  [STAND-OFF-TIGHT]  61.21,55.63 0 top
STANDOFF34  STAND-OFFTIGHT  [STAND-OFF-TIGHT]  61.21,35.31 0 top
STANDOFF35  STAND-OFFTIGHT  [STAND-OFF-TIGHT]  81.53,35.31 0 top
STANDOFF36  STAND-OFFTIGHT  [STAND-OFF-TIGHT]  81.53,55.63 0 top
STANDOFF37  STAND-OFFTIGHT  [STAND-OFF-TIGHT]  87.12,55.63 0 top
STANDOFF38  STAND-OFFTIGHT  [STAND-OFF-TIGHT]  87.12,35.31 0 top
STANDOFF39  STAND-OFFTIGHT  [STAND-OFF-TIGHT]  107.44,35.31 0 top
STANDOFF40  STAND-OFFTIGHT  [STAND-OFF-TIGHT]  107.44,55.63 0 top
STANDOFF41  STAND-OFFTIGHT  [STAND-OFF-TIGHT]  113.03,55.63 0 top
STANDOFF42  STAND-OFFTIGHT  [STAND-OFF-TIGHT]  113.03,35.31 0 top
STANDOFF43  STAND-OFFTIGHT  [STAND-OFF-TIGHT]  133.35,35.31 0 top
STANDOFF44  STAND-OFFTIGHT  [STAND-OFF-TIGHT]  133.35,55.63 0 top
STANDOFF45  STAND-OFFTIGHT  [STAND-OFF-TIGHT]  138.94,55.63 0 top
STANDOFF46  STAND-OFFTIGHT  [STAND-OFF-TIGHT]  138.94,35.31 0 top
STANDOFF47  STAND-OFFTIGHT  [STAND-OFF-TIGHT]  159.26,35.31 0 top
STANDOFF48  STAND-OFFTIGHT  [STAND-OFF-TIGHT]  159.26,55.63 0 top
STANDOFF49  STAND-OFFTIGHT  [STAND-OFF-TIGHT]  9.4,81.53 0 top
STANDOFF50  STAND-OFFTIGHT  [STAND-OFF-TIGHT]  9.4,61.21 0 top
STANDOFF51  STAND-OFFTIGHT  [STAND-OFF-TIGHT]  29.72,61.21 0 top
STANDOFF52  STAND-OFFTIGHT  [STAND-OFF-TIGHT]  29.72,81.53 0 top
STANDOFF53  STAND-OFFTIGHT  [STAND-OFF-TIGHT]  35.31,81.53 0 top
STANDOFF54  STAND-OFFTIGHT  [STAND-OFF-TIGHT]  35.31,61.21 0 top
STANDOFF55  STAND-OFFTIGHT  [STAND-OFF-TIGHT]  55.63,61.21 0 top
STANDOFF56  STAND-OFFTIGHT  [STAND-OFF-TIGHT]  55.63,81.53 0 top
STANDOFF57  STAND-OFFTIGHT  [STAND-OFF-TIGHT]  61.21,81.53 0 top
STANDOFF58  STAND-OFFTIGHT  [STAND-OFF-TIGHT]  61.21,61.21 0 top
STANDOFF59  STAND-OFFTIGHT  [STAND-OFF-TIGHT]  81.53,61.21 0 top
STANDOFF60  STAND-OFFTIGHT  [STAND-OFF-TIGHT]  81.53,81.53 0 top
STANDOFF61  STAND-OFFTIGHT  [STAND-OFF-TIGHT]  87.12,81.53 0 top
STANDOFF62  STAND-OFFTIGHT  [STAND-OFF-TIGHT]  87.12,61.21 0 top
STANDOFF63  STAND-OFFTIGHT  [STAND-OFF-TIGHT]  107.44,61.21 0 top
STANDOFF64  STAND-OFFTIGHT  [STAND-OFF-TIGHT]  107.44,81.53 0 top
STANDOFF65  STAND-OFFTIGHT  [STAND-OFF-TIGHT]  113.03,81.53 0 top
STANDOFF66  STAND-OFFTIGHT  [STAND-OFF-TIGHT]  113.03,61.21 0 top
STANDOFF67  STAND-OFFTIGHT  [STAND-OFF-TIGHT]  133.35,61.21 0 top
STANDOFF68  STAND-OFFTIGHT  [STAND-OFF-TIGHT]  133.35,81.53 0 top
STANDOFF69  STAND-OFFTIGHT  [STAND-OFF-TIGHT]  138.94,81.53 0 top
STANDOFF70  STAND-OFFTIGHT  [STAND-OFF-TIGHT]  138.94,61.21 0 top
STANDOFF71  STAND-OFFTIGHT  [STAND-OFF-TIGHT]  159.26,61.21 0 top
STANDOFF72  STAND-OFFTIGHT  [STAND-OFF-TIGHT]  159.26,81.53 0 top
STANDOFF73  STAND-OFFTIGHT  [STAND-OFF-TIGHT]  9.4,107.44 0 top
STANDOFF74  STAND-OFFTIGHT  [STAND-OFF-TIGHT]  9.4,87.12 0 top
STANDOFF75  STAND-OFFTIGHT  [STAND-OFF-TIGHT]  29.72,87.12 0 top
STANDOFF76  STAND-OFFTIGHT  [STAND-OFF-TIGHT]  29.72,107.44 0 top
STANDOFF77  STAND-OFFTIGHT  [STAND-OFF-TIGHT]  35.31,107.44 0 top
STANDOFF78  STAND-OFFTIGHT  [STAND-OFF-TIGHT]  35.31,87.12 0 top
STANDOFF79  STAND-OFFTIGHT  [STAND-OFF-TIGHT]  55.63,87.12 0 top
STANDOFF80  STAND-OFFTIGHT  [STAND-OFF-TIGHT]  55.63,107.44 0 top
STANDOFF81  STAND-OFFTIGHT  [STAND-OFF-TIGHT]  61.21,107.44 0 top
STANDOFF82  STAND-OFFTIGHT  [STAND-OFF-TIGHT]  61.21,87.12 0 top
STANDOFF83  STAND-OFFTIGHT  [STAND-OFF-TIGHT]  81.53,87.12 0 top
STANDOFF84  STAND-OFFTIGHT  [STAND-OFF-TIGHT]  81.53,107.44 0 top
STANDOFF85  STAND-OFFTIGHT  [STAND-OFF-TIGHT]  87.12,107.44 0 top
STANDOFF86  STAND-OFFTIGHT  [STAND-OFF-TIGHT]  87.12,87.12 0 top
STANDOFF87  STAND-OFFTIGHT  [STAND-OFF-TIGHT]  107.44,87.12 0 top
STANDOFF88  STAND-OFFTIGHT  [STAND-OFF-TIGHT]  107.44,107.44 0 top
STANDOFF89  STAND-OFFTIGHT  [STAND-OFF-TIGHT]  113.03,107.44 0 top
STANDOFF90  STAND-OFFTIGHT  [STAND-OFF-TIGHT]  113.03,87.12 0 top
STANDOFF91  STAND-OFFTIGHT  [STAND-OFF-TIGHT]  133.35,87.12 0 top
STANDOFF92  STAND-OFFTIGHT  [STAND-OFF-TIGHT]  133.35,107.44 0 top
STANDOFF93  STAND-OFFTIGHT  [STAND-OFF-TIGHT]  138.94,107.44 0 top
STANDOFF94  STAND-OFFTIGHT  [STAND-OFF-TIGHT]  138.94,87.12 0 top
STANDOFF95  STAND-OFFTIGHT  [STAND-OFF-TIGHT]  159.26,87.12 0 top
STANDOFF96  STAND-OFFTIGHT  [STAND-OFF-TIGHT]  159.26,107.44 0 top
U1  OPT4048  [FCSOT]  19.56,19.56 0 top
U2  OPT4048  [FCSOT]  45.47,19.56 0 top
U3  OPT4048  [FCSOT]  71.37,19.56 0 top
U4  OPT4048  [FCSOT]  97.28,19.56 0 top
U5  OPT4048  [FCSOT]  123.19,19.56 0 top
U6  OPT4048  [FCSOT]  149.1,19.56 0 top
U7  OPT4048  [FCSOT]  19.56,45.47 0 top
U8  OPT4048  [FCSOT]  45.47,45.47 0 top
U9  OPT4048  [FCSOT]  71.37,45.47 0 top
U10  OPT4048  [FCSOT]  97.28,45.47 0 top
U11  OPT4048  [FCSOT]  123.19,45.47 0 top
U12  OPT4048  [FCSOT]  149.1,45.47 0 top
U13  OPT4048  [FCSOT]  19.56,71.37 0 top
U14  OPT4048  [FCSOT]  45.47,71.37 0 top
U15  OPT4048  [FCSOT]  71.37,71.37 0 top
U16  OPT4048  [FCSOT]  97.28,71.37 0 top
U17  OPT4048  [FCSOT]  123.19,71.37 0 top
U18  OPT4048  [FCSOT]  149.1,71.37 0 top
U19  OPT4048  [FCSOT]  19.56,97.28 0 top
U20  OPT4048  [FCSOT]  45.47,97.28 0 top
U21  OPT4048  [FCSOT]  71.37,97.28 0 top
U22  OPT4048  [FCSOT]  97.28,97.28 0 top
U23  OPT4048  [FCSOT]  123.19,97.28 0 top
U24  OPT4048  [FCSOT]  149.1,97.28 0 top
U$1  [#3V3#1]  17.02,10.82 90 top
U$2  [#GND#0]  14.5,10.85 90 top
U$3  [#SDA#1]  19.56,10.79 270 bottom
U$4  [#SDA#4]  19.56,10.82 90 top
U$5  [#SCL#5]  22.12,10.67 90 top
U$6  [#INT#3]  24.64,10.54 270 bottom
U$7  [#INT#9]  24.64,10.54 90 top
U$8  [#0X44#18]  12.4,15.98 0 bottom
U$9  [COLOR_SENSOR227]  19.56,26.54 0 bottom
U$10  [#I2C#227]  23.34,19.99 0 bottom
U$11  [#0X45#18]  12.55,18.26 0 bottom
U$12  [COLOR_SENSOR227]  19.56,25.27 0 top
U$13  [TRISTIMULUS228]  19.56,27.18 0 top
U$14  [OPT4048229]  19.56,23.37 0 top
U$15  [#3V3#1]  17.02,10.82 270 bottom
U$16  [#LED#11]  30.48,23.85 0 bottom
U$17  [#GND#0]  14.5,10.85 270 bottom
U$18  [SFE_LOGO_NAME_.1]  19.56,29.72 0 top
U$19  [OPT4048229]  19.56,24.64 0 bottom
U$20  [DEF_ADDRESS#_17]  21.87,16.1 0 bottom
U$21  [#0X46#18]  12.5,20.45 0 bottom
U$22  [#SCL#5]  22.12,10.67 270 bottom
U$23  [#3V3#1]  42.93,10.82 90 top
U$24  [#GND#0]  40.41,10.85 90 top
U$25  [#SDA#4]  45.47,10.82 90 top
U$26  [#SCL#5]  48.03,10.67 90 top
U$27  [#3V3#1]  42.93,10.82 270 bottom
U$28  [PWR8]  28.5,24.89 90 top
U$29  [SFE_LOGO_FLAME_.1]  30.05,12.83 0 top
U$30  [#GND#0]  40.41,10.85 270 bottom
U$31  [#SCL#5]  48.03,10.67 270 bottom
U$32  [#LED#11]  56.39,23.85 0 bottom
U$33  [PWR8]  54.41,24.89 90 top
U$34  [SFE_LOGO_FLAME_.1]  55.96,12.83 0 top
U$35  [#SDA#1]  45.47,10.79 270 bottom
U$36  [#INT#3]  50.55,10.54 270 bottom
U$37  [#INT#9]  50.55,10.54 90 top
U$38  [#I2C#227]  49.25,19.99 0 bottom
U$39  [COLOR_SENSOR227]  45.47,25.27 0 top
U$40  [TRISTIMULUS228]  45.47,27.18 0 top
U$41  [OPT4048229]  45.47,23.37 0 top
U$42  [SFE_LOGO_NAME_.1]  45.47,29.72 0 top
U$43  [COLOR_SENSOR227]  45.47,26.54 0 bottom
U$44  [OPT4048229]  45.47,24.64 0 bottom
U$45  [DEF_ADDRESS#_17]  47.78,16.1 0 bottom
U$46  [#0X44#18]  38.3,15.98 0 bottom
U$47  [#0X45#18]  38.46,18.26 0 bottom
U$48  [#0X46#18]  38.4,20.45 0 bottom
U$49  [#3V3#1]  68.83,10.82 90 top
U$50  [#GND#0]  66.32,10.85 90 top
U$51  [#SDA#4]  71.37,10.82 90 top
U$52  [#SCL#5]  73.94,10.67 90 top
U$53  [#3V3#1]  68.83,10.82 270 bottom
U$54  [#GND#0]  66.32,10.85 270 bottom
U$55  [#SCL#5]  73.94,10.67 270 bottom
U$56  [#LED#11]  82.3,23.85 0 bottom
U$57  [PWR8]  80.31,24.89 90 top
U$58  [SFE_LOGO_FLAME_.1]  81.86,12.83 0 top
U$59  [#SDA#1]  71.37,10.79 270 bottom
U$60  [#INT#3]  76.45,10.54 270 bottom
U$61  [#INT#9]  76.45,10.54 90 top
U$62  [#I2C#227]  75.16,19.99 0 bottom
U$63  [COLOR_SENSOR227]  71.37,25.27 0 top
U$64  [TRISTIMULUS228]  71.37,27.18 0 top
U$65  [OPT4048229]  71.37,23.37 0 top
U$66  [SFE_LOGO_NAME_.1]  71.37,29.72 0 top
U$67  [COLOR_SENSOR227]  71.37,26.54 0 bottom
U$68  [OPT4048229]  71.37,24.64 0 bottom
U$69  [DEF_ADDRESS#_17]  73.69,16.1 0 bottom
U$70  [#0X44#18]  64.21,15.98 0 bottom
U$71  [#0X45#18]  64.36,18.26 0 bottom
U$72  [#0X46#18]  64.31,20.45 0 bottom
U$73  [#3V3#1]  94.74,10.82 90 top
U$74  [#GND#0]  92.23,10.85 90 top
U$75  [#SDA#4]  97.28,10.82 90 top
U$76  [#SCL#5]  99.85,10.67 90 top
U$77  [#3V3#1]  94.74,10.82 270 bottom
U$78  [#GND#0]  92.23,10.85 270 bottom
U$79  [#SCL#5]  99.85,10.67 270 bottom
U$80  [#LED#11]  108.2,23.85 0 bottom
U$81  [PWR8]  106.22,24.89 90 top
U$82  [SFE_LOGO_FLAME_.1]  107.77,12.83 0 top
U$83  [#SDA#1]  97.28,10.79 270 bottom
U$84  [#INT#3]  102.36,10.54 270 bottom
U$85  [#INT#9]  102.36,10.54 90 top
U$86  [#I2C#227]  101.07,19.99 0 bottom
U$87  [COLOR_SENSOR227]  97.28,25.27 0 top
U$88  [TRISTIMULUS228]  97.28,27.18 0 top
U$89  [OPT4048229]  97.28,23.37 0 top
U$90  [SFE_LOGO_NAME_.1]  97.28,29.72 0 top
U$91  [COLOR_SENSOR227]  97.28,26.54 0 bottom
U$92  [OPT4048229]  97.28,24.64 0 bottom
U$93  [DEF_ADDRESS#_17]  99.59,16.1 0 bottom
U$94  [#0X44#18]  90.12,15.98 0 bottom
U$95  [#0X45#18]  90.27,18.26 0 bottom
U$96  [#0X46#18]  90.22,20.45 0 bottom
U$97  [#3V3#1]  120.65,10.82 90 top
U$98  [#GND#0]  118.14,10.85 90 top
U$99  [#SDA#4]  123.19,10.82 90 top
U$100  [#SCL#5]  125.76,10.67 90 top
U$101  [#3V3#1]  120.65,10.82 270 bottom
U$102  [#GND#0]  118.14,10.85 270 bottom
U$103  [#SCL#5]  125.76,10.67 270 bottom
U$104  [#LED#11]  134.11,23.85 0 bottom
U$105  [PWR8]  132.13,24.89 90 top
U$106  [SFE_LOGO_FLAME_.1]  133.68,12.83 0 top
U$107  [#SDA#1]  123.19,10.79 270 bottom
U$108  [#INT#3]  128.27,10.54 270 bottom
U$109  [#INT#9]  128.27,10.54 90 top
U$110  [#I2C#227]  126.97,19.99 0 bottom
U$111  [COLOR_SENSOR227]  123.19,25.27 0 top
U$112  [TRISTIMULUS228]  123.19,27.18 0 top
U$113  [OPT4048229]  123.19,23.37 0 top
U$114  [SFE_LOGO_NAME_.1]  123.19,29.72 0 top
U$115  [COLOR_SENSOR227]  123.19,26.54 0 bottom
U$116  [OPT4048229]  123.19,24.64 0 bottom
U$117  [DEF_ADDRESS#_17]  125.5,16.1 0 bottom
U$118  [#0X44#18]  116.03,15.98 0 bottom
U$119  [#0X45#18]  116.18,18.26 0 bottom
U$120  [#0X46#18]  116.13,20.45 0 bottom
U$121  [#3V3#1]  146.56,10.82 90 top
U$122  [#GND#0]  144.04,10.85 90 top
U$123  [#SDA#4]  149.1,10.82 90 top
U$124  [#SCL#5]  151.66,10.67 90 top
U$125  [#3V3#1]  146.56,10.82 270 bottom
U$126  [#GND#0]  144.04,10.85 270 bottom
U$127  [#SCL#5]  151.66,10.67 270 bottom
U$128  [#LED#11]  160.02,23.85 0 bottom
U$129  [PWR8]  158.04,24.89 90 top
U$130  [SFE_LOGO_FLAME_.1]  159.59,12.83 0 top
U$131  [#SDA#1]  149.1,10.79 270 bottom
U$132  [#INT#3]  154.18,10.54 270 bottom
U$133  [#INT#9]  154.18,10.54 90 top
U$134  [#I2C#227]  152.88,19.99 0 bottom
U$135  [COLOR_SENSOR227]  149.1,25.27 0 top
U$136  [TRISTIMULUS228]  149.1,27.18 0 top
U$137  [OPT4048229]  149.1,23.37 0 top
U$138  [SFE_LOGO_NAME_.1]  149.1,29.72 0 top
U$139  [COLOR_SENSOR227]  149.1,26.54 0 bottom
U$140  [OPT4048229]  149.1,24.64 0 bottom
U$141  [DEF_ADDRESS#_17]  151.41,16.1 0 bottom
U$142  [#0X44#18]  141.94,15.98 0 bottom
U$143  [#0X45#18]  142.09,18.26 0 bottom
U$144  [#0X46#18]  142.04,20.45 0 bottom
U$145  [#3V3#1]  17.02,36.73 90 top
U$146  [#GND#0]  14.5,36.75 90 top
U$147  [#SDA#4]  19.56,36.73 90 top
U$148  [#SCL#5]  22.12,36.58 90 top
U$149  [#3V3#1]  17.02,36.73 270 bottom
U$150  [#GND#0]  14.5,36.75 270 bottom
U$151  [#SCL#5]  22.12,36.58 270 bottom
U$152  [#LED#11]  30.48,49.76 0 bottom
U$153  [PWR8]  28.5,50.8 90 top
U$154  [SFE_LOGO_FLAME_.1]  30.05,38.73 0 top
U$155  [#SDA#1]  19.56,36.7 270 bottom
U$156  [#INT#3]  24.64,36.45 270 bottom
U$157  [#INT#9]  24.64,36.45 90 top
U$158  [#I2C#227]  23.34,45.9 0 bottom
U$159  [COLOR_SENSOR227]  19.56,51.18 0 top
U$160  [TRISTIMULUS228]  19.56,53.09 0 top
U$161  [OPT4048229]  19.56,49.28 0 top
U$162  [SFE_LOGO_NAME_.1]  19.56,55.63 0 top
U$163  [COLOR_SENSOR227]  19.56,52.45 0 bottom
U$164  [OPT4048229]  19.56,50.55 0 bottom
U$165  [DEF_ADDRESS#_17]  21.87,42.01 0 bottom
U$166  [#0X44#18]  12.4,41.88 0 bottom
U$167  [#0X45#18]  12.55,44.17 0 bottom
U$168  [#0X46#18]  12.5,46.35 0 bottom
U$169  [#3V3#1]  42.93,36.73 90 top
U$170  [#GND#0]  40.41,36.75 90 top
U$171  [#SDA#4]  45.47,36.73 90 top
U$172  [#SCL#5]  48.03,36.58 90 top
U$173  [#3V3#1]  42.93,36.73 270 bottom
U$174  [#GND#0]  40.41,36.75 270 bottom
U$175  [#SCL#5]  48.03,36.58 270 bottom
U$176  [#LED#11]  56.39,49.76 0 bottom
U$177  [PWR8]  54.41,50.8 90 top
U$178  [SFE_LOGO_FLAME_.1]  55.96,38.73 0 top
U$179  [#SDA#1]  45.47,36.7 270 bottom
U$180  [#INT#3]  50.55,36.45 270 bottom
U$181  [#INT#9]  50.55,36.45 90 top
U$182  [#I2C#227]  49.25,45.9 0 bottom
U$183  [COLOR_SENSOR227]  45.47,51.18 0 top
U$184  [TRISTIMULUS228]  45.47,53.09 0 top
U$185  [OPT4048229]  45.47,49.28 0 top
U$186  [SFE_LOGO_NAME_.1]  45.47,55.63 0 top
U$187  [COLOR_SENSOR227]  45.47,52.45 0 bottom
U$188  [OPT4048229]  45.47,50.55 0 bottom
U$189  [DEF_ADDRESS#_17]  47.78,42.01 0 bottom
U$190  [#0X44#18]  38.3,41.88 0 bottom
U$191  [#0X45#18]  38.46,44.17 0 bottom
U$192  [#0X46#18]  38.4,46.35 0 bottom
U$193  [#3V3#1]  68.83,36.73 90 top
U$194  [#GND#0]  66.32,36.75 90 top
U$195  [#SDA#4]  71.37,36.73 90 top
U$196  [#SCL#5]  73.94,36.58 90 top
U$197  [#3V3#1]  68.83,36.73 270 bottom
U$198  [#GND#0]  66.32,36.75 270 bottom
U$199  [#SCL#5]  73.94,36.58 270 bottom
U$200  [#LED#11]  82.3,49.76 0 bottom
U$201  [PWR8]  80.31,50.8 90 top
U$202  [SFE_LOGO_FLAME_.1]  81.86,38.73 0 top
U$203  [#SDA#1]  71.37,36.7 270 bottom
U$204  [#INT#3]  76.45,36.45 270 bottom
U$205  [#INT#9]  76.45,36.45 90 top
U$206  [#I2C#227]  75.16,45.9 0 bottom
U$207  [COLOR_SENSOR227]  71.37,51.18 0 top